# Allegro board kupl_t_0825.brd
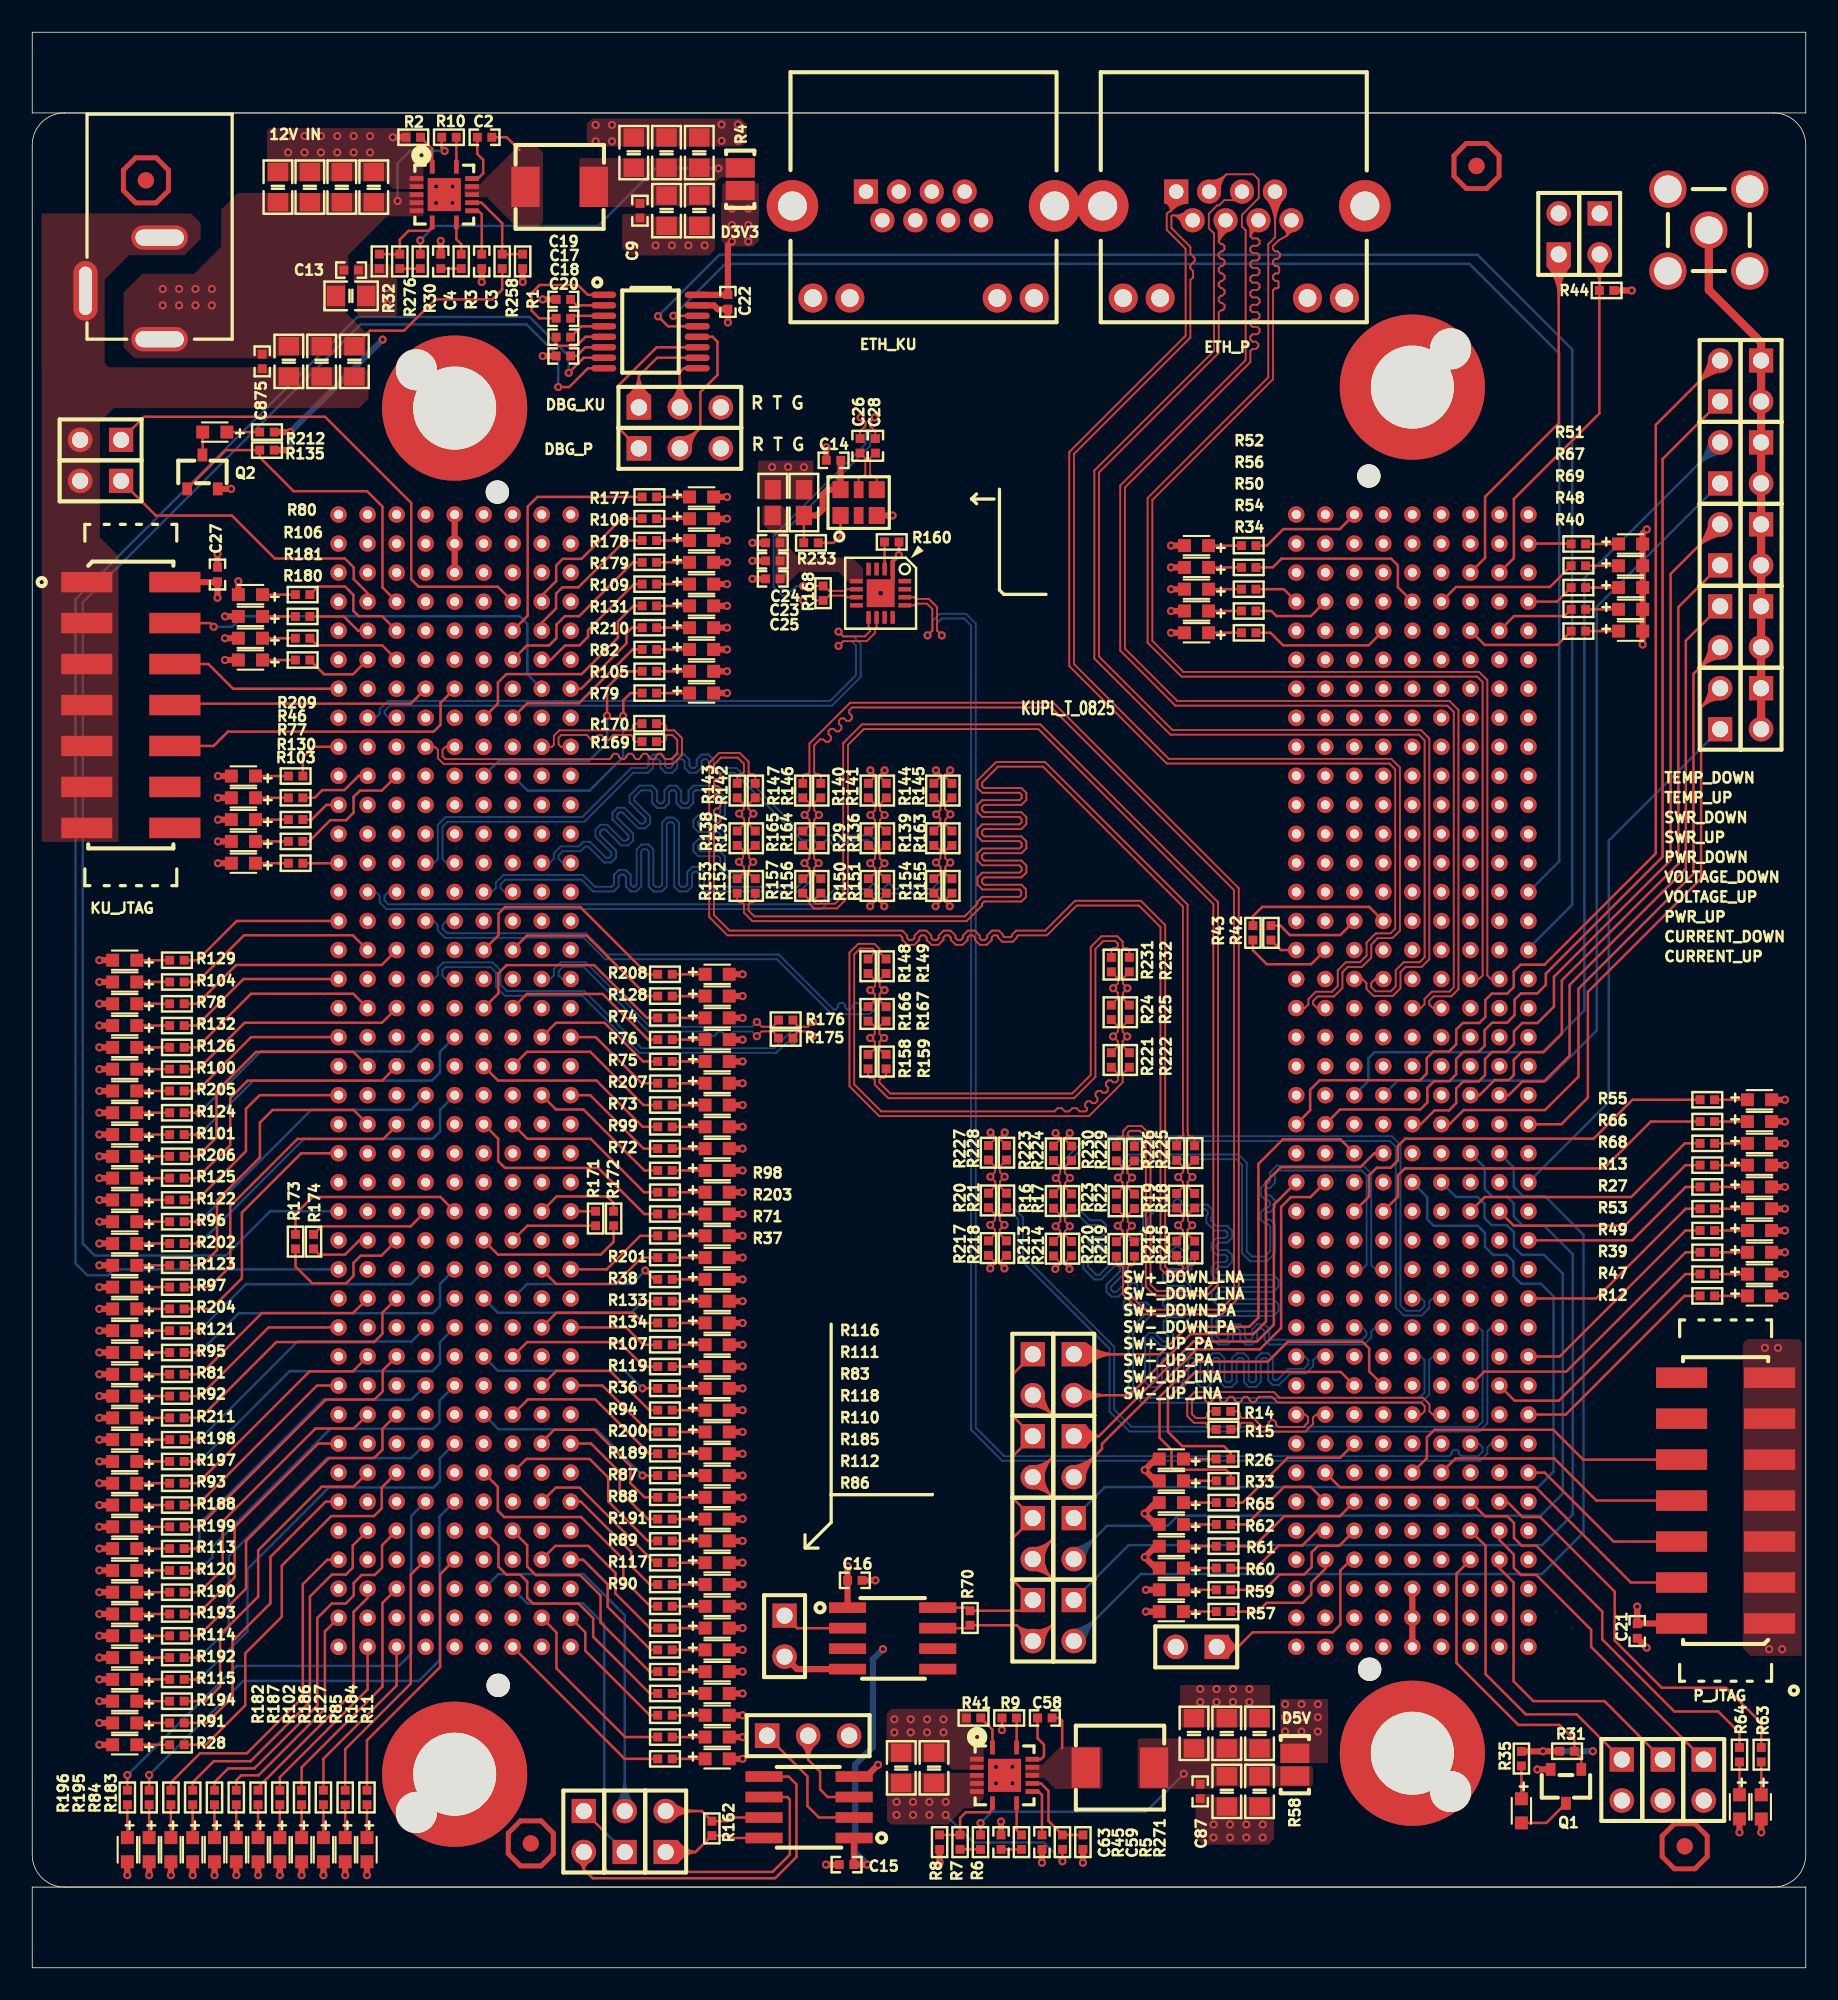
[diagram p0: board, top side]
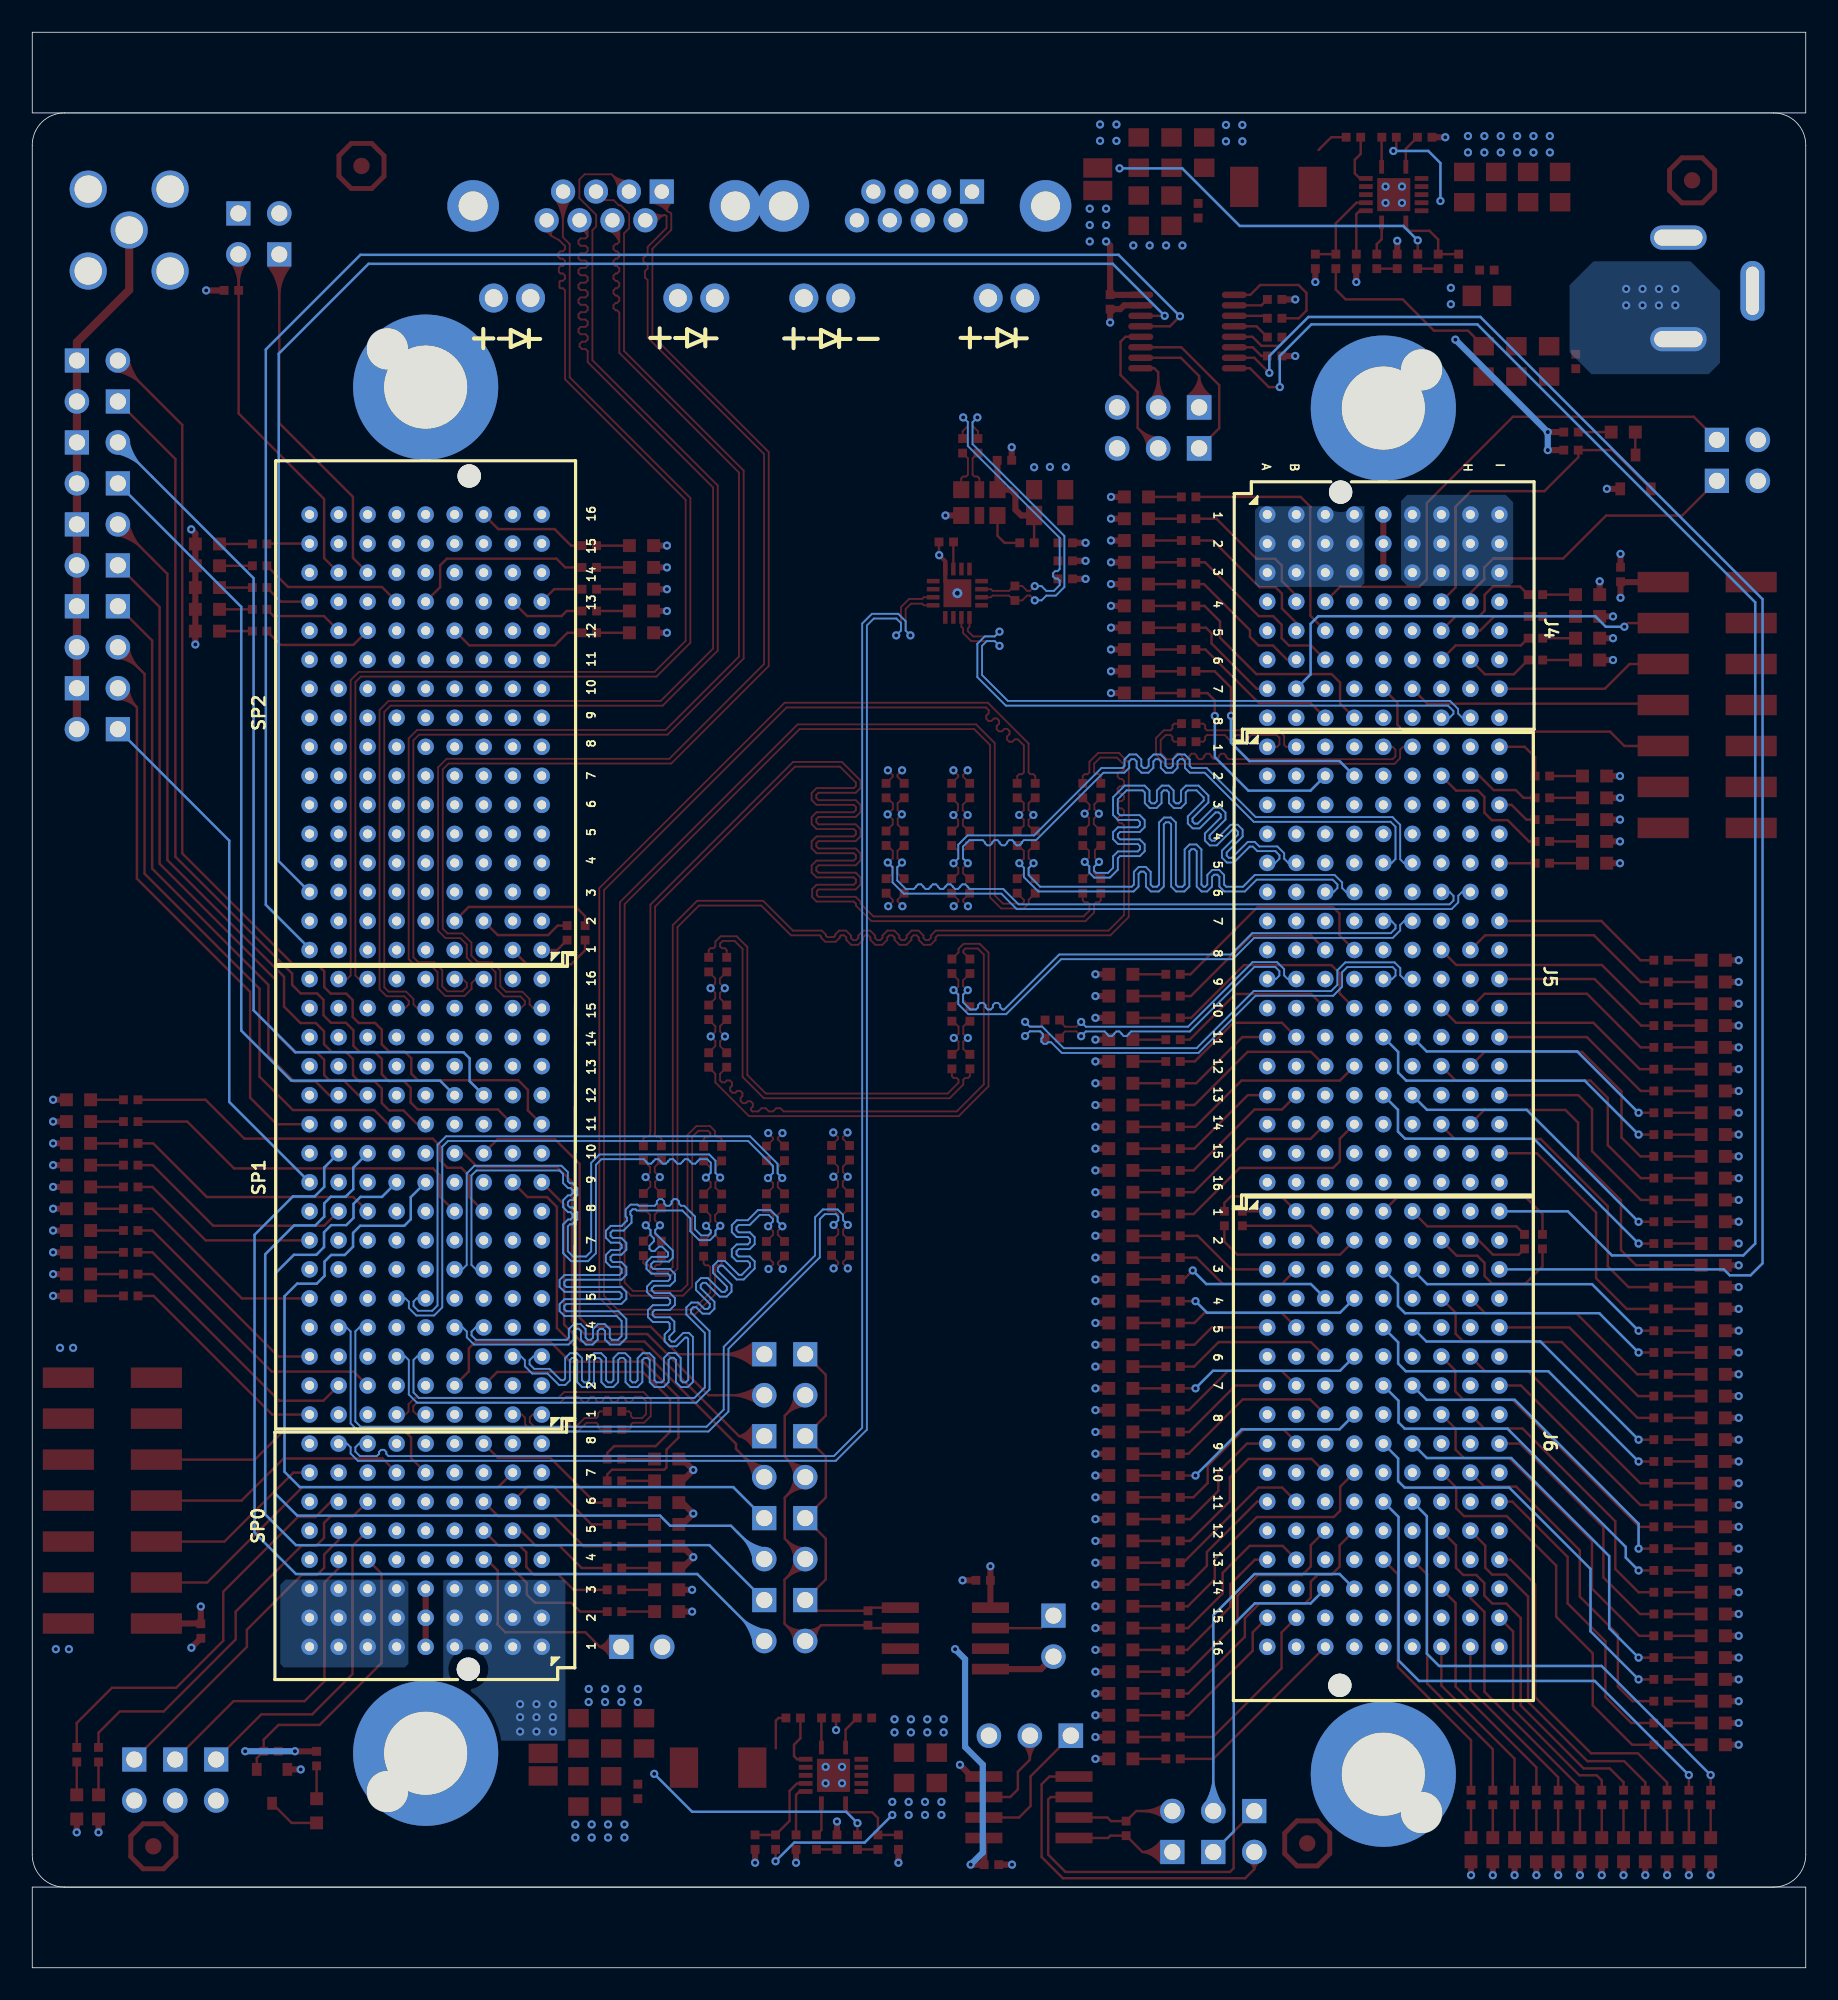
[diagram p1: board, bottom side, seen from below]

Outline 110 x 120 mm; copper layers: TOP, GND02, ART03, PWR04, PWR05, ART06, GND07, BOTTOM. Coordinates in mm from the lower left corner of the outline.
Outline path: 0,120 0,115 110,115 110,120 0,120 ; 0,113 arc(0.59,114.41) 2,115 108,115 arc(109.41,114.41) 110,113 110,7 arc(109.41,5.59) 108,5 2,5 arc(0.59,5.59) 0,7 0,113 ; 0,5 110,5 110,0 0,0 0,5

## Design rules (mm)
net group CLK100: nets UNNAMED_4_C_I128_B0 UNNAMED_4_C_I129_B0
net group CLK100M: nets UNNAMED_4_C_I129_A0 UNNAMED_4_R_I8_B0
net group DI_SRIO_KU: nets DI+_SRIO_KU DI-_SRIO_KU
net group DO_SRIO_KU: nets DO+_SRIO_KU DO-_SRIO_KU
net group ETH_TD1_KU: nets ETH_TD1+_KU ETH_TD1-_KU
net group ETH_TD1_P: nets ETH_TD1+_P ETH_TD1-_P
net group ETH_TD2_KU: nets ETH_TD2+_KU ETH_TD2-_KU
net group ETH_TD2_P: nets ETH_TD2+_P ETH_TD2-_P
net group ETH_TD3_KU: nets ETH_TD3+_KU ETH_TD3-_KU
net group ETH_TD3_P: nets ETH_TD3+_P ETH_TD3-_P
net group ETH_TD4_KU: nets ETH_TD4+_KU ETH_TD4-_KU
net group ETH_TD4_P: nets ETH_TD4+_P ETH_TD4-_P
net group KU2P_AUX: nets UNNAMED_4_R_I107_A0 UNNAMED_4_R_I108_A0
net group P2KU_AUX: nets UNNAMED_4_R_I117_B0 UNNAMED_4_R_I118_B0
net group REFCLK_KU: nets REFCLK+_KU REFCLK-_KU
net group REFCLK_P: nets REFCLK+_P REFCLK-_P
net group SRIO_AUX_KU2P: nets SRIO+_AUX_KU2P SRIO-_AUX_KU2P
net group SRIO_AUX_KU2P_K: nets SRIO+_AUX_KU2P_K SRIO-_AUX_KU2P_K
net group SRIO_AUX_P2KU: nets SRIO+_AUX_P2KU SRIO-_AUX_P2KU
net group SRIO_AUX_P2KU_K: nets SRIO+_AUX_P2KU_K SRIO-_AUX_P2KU_K
net group SRIO_KU2NET: nets SRIO+_KU2NET SRIO-_KU2NET
net group SRIO_NET2KU: nets SRIO+_NET2KU SRIO-_NET2KU
net group SRIO_NET2P: nets SRIO+_NET2P SRIO-_NET2P
net group SRIO_P2NET: nets SRIO+_P2NET SRIO-_P2NET
net group KU2P_MAIN: nets UNNAMED_4_R_I49_B0 UNNAMED_4_R_I100_A0 UNNAMED_4_R_I101_A0 UNNAMED_4_R_I102_A0 UNNAMED_4_R_I103_A0 UNNAMED_4_R_I104_A0 UNNAMED_4_R_I105_A0 UNNAMED_4_R_I106_A0
net group P2KU_MAIN: nets UNNAMED_4_R_I109_B0 UNNAMED_4_R_I110_B0 UNNAMED_4_R_I111_B0 UNNAMED_4_R_I112_B0 UNNAMED_4_R_I113_B0 UNNAMED_4_R_I114_B0 UNNAMED_4_R_I115_B0 UNNAMED_4_R_I116_B0
net group SRIO_MAIN_KU2P: nets SRIO0+_MAIN_KU2P SRIO0-_MAIN_KU2P SRIO1+_MAIN_KU2P SRIO1-_MAIN_KU2P SRIO2+_MAIN_KU2P SRIO2-_MAIN_KU2P SRIO3+_MAIN_KU2P SRIO3-_MAIN_KU2P
net group SRIO_MAIN_KU2P_K: nets SRIO0+_MAIN_KU2P_K SRIO0-_MAIN_KU2P_K SRIO1+_MAIN_KU2P_K SRIO1-_MAIN_KU2P_K SRIO2+_MAIN_KU2P_K SRIO2-_MAIN_KU2P_K SRIO3+_MAIN_KU2P_K SRIO3-_MAIN_KU2P_K
net group SRIO_MAIN_P2KU: nets SRIO0+_MAIN_P2KU SRIO0-_MAIN_P2KU SRIO1+_MAIN_P2KU SRIO1-_MAIN_P2KU SRIO2+_MAIN_P2KU SRIO2-_MAIN_P2KU SRIO3+_MAIN_P2KU SRIO3-_MAIN_P2KU
net group SRIO_MAIN_P2KU_K: nets SRIO0+_MAIN_P2KU_K SRIO0-_MAIN_P2KU_K SRIO1+_MAIN_P2KU_K SRIO1-_MAIN_P2KU_K SRIO2+_MAIN_P2KU_K SRIO2-_MAIN_P2KU_K SRIO3+_MAIN_P2KU_K SRIO3-_MAIN_P2KU_K

## Placement (name value [footprint] x y rotation side)
C1  -  [C0805_S]  19.2 110.4 270 top
C2  -  [C0402_S]  28.06 113.49 0 top
C3  -  [C0402_S]  27.88 105.79 90 top
C4  -  [C0402_S]  25.34 105.79 270 top
C5  -  [C0805_S]  41.37 112.54 270 top
C6  -  [C0805_S]  41.37 108.94 90 top
C7  -  [C0805_S]  39.34 112.54 270 top
C8  -  [C0805_S]  39.34 108.94 90 top
C9  -  [C0402_S]  37.69 108.94 90 top
C10  -  [C0805_S]  53.9 12.39 270 top
C11  -  [C0805_S]  21.18 110.4 270 top
C12  -  [C0805_S]  76.12 14.53 270 top
C13  -  [C0402_S]  19.78 105.26 180 top
C14  -  [C0402_S]  49.7 93.46 0 top
C15  -  [C0402_S]  50.51 6.39 0 top
C16  -  [C0402_S]  51.02 24.02 180 top
C17  -  [C0402_S]  32.94 102.27 180 top
C18  -  [C0402_S]  32.94 101.1 0 top
C19  -  [C0402_S]  32.94 103.43 0 top
C20  -  [C0402_S]  32.94 99.93 0 top
C21  -  [C0402_S]  99.55 20.88 270 top
C22  -  [C0402_S]  43.15 103.28 270 top
C23  -  [C0402_S]  45.93 87.23 0 top
C24  -  [C0402_S]  45.93 88.35 0 top
C25  -  [C0402_S]  45.93 86.11 0 top
C26  -  [C0402_S]  51.34 94.36 270 top
C27  -  [C0402_S]  11.49 86.38 90 top
C28  -  [C0402_S]  52.29 94.36 270 top
C47  -  [C0805_S]  55.93 12.39 270 top
C51  -  [C0805_S]  17.22 110.4 270 top
C53  -  [C0805_S]  19.78 103.66 180 top
C54  -  [C0805_S]  17.95 99.59 90 top
C58  -  [C0402_S]  62.8 15.49 0 top
C59  -  [C0402_S]  62.63 7.79 90 top
C63  -  [C0402_S]  60.09 7.79 270 top
C77  -  [C0805_S]  74.09 10.93 90 top
C79  -  [C0805_S]  37.31 112.54 270 top
C81  -  [C0805_S]  76.12 10.93 90 top
C83  -  [C0805_S]  74.09 14.53 270 top
C85  -  [C0805_S]  72.06 14.53 270 top
C87  -  [C0402_S]  72.44 10.93 90 top
C127  -  [C0805_S]  19.98 99.59 90 top
C128  -  [C0805_S]  15.92 99.59 90 top
C129  -  [C0805_S]  15.24 110.4 270 top
C875  -  [C0402_S]  14.26 99.59 90 top
CN1  -  [AC_CONN_3]  7.9 100.97 270 top
D1  -  [EVLT_19_217_S]  107.13 41.65 180 top
D2  -  [EVLT_19_217_S]  107.13 49.76 180 top
D3  -  [EVLT_19_217_S]  70.65 31.54 0 top
D4  -  [EVLT_19_217_S]  107.13 48.41 180 top
D5  -  [EVLT_19_217_S]  70.65 30.19 0 top
D6  -  [EVLT_19_217_S]  72.21 82.77 0 top
D7  -  [EVLT_19_217_S]  92.36 9.73 90 top
D8  -  [EVLT_19_217_S]  5.74 17.88 0 top
D9  -  [EVLT_19_217_S]  107.13 44.36 180 top
D10  -  [EVLT_19_217_S]  99.14 82.87 180 top
D11  -  [EVLT_19_217_S]  107.13 43.01 180 top
D12  -  [EVLT_19_217_S]  99.14 84.22 180 top
D13  -  [EVLT_19_217_S]  107.13 45.71 180 top
D14  -  [EVLT_19_217_S]  72.21 85.47 0 top
D15  -  [EVLT_19_217_S]  107.13 47.06 180 top
D16  -  [EVLT_19_217_S]  72.21 84.12 0 top
D17  -  [EVLT_19_217_S]  99.14 88.27 180 top
D18  -  [EVLT_19_217_S]  72.21 88.17 0 top
D19  -  [EVLT_19_217_S]  107.13 53.81 180 top
D20  -  [EVLT_19_217_S]  72.21 86.82 0 top
D21  -  [EVLT_19_217_S]  107.13 52.46 180 top
D22  -  [EVLT_19_217_S]  99.14 86.92 180 top
D23  -  [EVLT_19_217_S]  70.65 22.08 0 top
D24  -  [EVLT_19_217_S]  70.65 23.43 0 top
D25  -  [EVLT_19_217_S]  70.65 24.78 0 top
D26  -  [EVLT_19_217_S]  70.65 26.13 0 top
D27  -  [EVLT_19_217_S]  70.65 27.49 0 top
D28  -  [EVLT_19_217_S]  107.24 9.97 90 top
D29  -  [EVLT_19_217_S]  105.89 9.97 90 top
D30  -  [EVLT_19_217_S]  70.65 28.84 0 top
D31  -  [EVLT_19_217_S]  107.13 51.11 180 top
D32  -  [EVLT_19_217_S]  99.14 85.57 180 top
D33  VAL  [SPX_TSSOP16_S]  38.35 101.44 0 top
D34  -  [EVLT_19_217_S]  11.3 7.32 90 top
D35  -  [EVLT_19_217_S]  20.76 7.32 90 top
D36  -  [EVLT_19_217_S]  42.48 15.65 180 top
D37  -  [EVLT_19_217_S]  5.74 28.69 0 top
D38  -  [EVLT_19_217_S]  5.74 23.28 0 top
D39  -  [EVLT_19_217_S]  5.74 19.23 0 top
D40  -  [EVLT_19_217_S]  5.74 13.82 0 top
D41  -  [EVLT_19_217_S]  7.25 7.32 90 top
D42  -  [EVLT_19_217_S]  5.74 31.39 0 top
D43  -  [EVLT_19_217_S]  42.48 35.92 180 top
D44  -  [EVLT_19_217_S]  42.48 45.38 180 top
D45  -  [EVLT_19_217_S]  42.48 42.68 180 top
D46  -  [EVLT_19_217_S]  42.48 48.08 180 top
D47  -  [EVLT_19_217_S]  5.74 40.85 0 top
D48  -  [EVLT_19_217_S]  5.74 54.36 0 top
D49  -  [EVLT_19_217_S]  5.74 50.31 0 top
D50  -  [EVLT_19_217_S]  42.48 54.84 180 top
D51  -  [EVLT_19_217_S]  13.1 72.53 0 top
D52  -  [EVLT_19_217_S]  42.48 61.59 180 top
D53  -  [EVLT_19_217_S]  13.1 73.89 0 top
D54  -  [EVLT_19_217_S]  41.51 83.08 180 top
D55  -  [EVLT_19_217_S]  5.74 34.09 0 top
D56  -  [EVLT_19_217_S]  13.53 82.43 0 top
D57  -  [EVLT_19_217_S]  9.95 7.32 90 top
D58  -  [EVLT_19_217_S]  19.41 7.32 90 top
D59  -  [EVLT_19_217_S]  15.36 7.32 90 top
D60  -  [EVLT_19_217_S]  12.65 7.32 90 top
D61  -  [EVLT_19_217_S]  42.48 31.87 180 top
D62  -  [EVLT_19_217_S]  42.48 27.81 180 top
D63  -  [EVLT_19_217_S]  5.74 21.93 0 top
D64  -  [EVLT_19_217_S]  5.74 16.53 0 top
D65  -  [EVLT_19_217_S]  5.9 7.32 90 top
D66  -  [EVLT_19_217_S]  5.74 32.74 0 top
D67  -  [EVLT_19_217_S]  5.74 27.34 0 top
D68  -  [EVLT_19_217_S]  42.48 33.22 180 top
D69  -  [EVLT_19_217_S]  42.48 44.03 180 top
D70  -  [EVLT_19_217_S]  5.74 44.9 0 top
D71  -  [EVLT_19_217_S]  42.48 46.73 180 top
D72  -  [EVLT_19_217_S]  42.48 50.78 180 top
D73  -  [EVLT_19_217_S]  42.48 53.49 180 top
D74  -  [EVLT_19_217_S]  42.48 58.89 180 top
D75  -  [EVLT_19_217_S]  42.48 56.19 180 top
D76  -  [EVLT_19_217_S]  42.48 57.54 180 top
D77  -  [EVLT_19_217_S]  13.1 71.18 0 top
D78  -  [EVLT_19_217_S]  5.74 59.77 0 top
D79  -  [EVLT_19_217_S]  41.51 79.03 180 top
D80  -  [EVLT_19_217_S]  13.53 85.13 0 top
D81  -  [EVLT_19_217_S]  5.74 36.79 0 top
D82  -  [EVLT_19_217_S]  41.51 81.73 180 top
D83  -  [EVLT_19_217_S]  42.48 19.71 180 top
D84  -  [EVLT_19_217_S]  8.6 7.32 90 top
D85  -  [EVLT_19_217_S]  18.06 7.32 90 top
D86  -  [EVLT_19_217_S]  42.48 12.95 180 top
D87  -  [EVLT_19_217_S]  42.48 30.52 180 top
D88  -  [EVLT_19_217_S]  42.48 29.17 180 top
D89  -  [EVLT_19_217_S]  42.48 26.46 180 top
D90  -  [EVLT_19_217_S]  42.48 23.76 180 top
D91  -  [EVLT_19_217_S]  5.74 15.18 0 top
D92  -  [EVLT_19_217_S]  5.74 35.44 0 top
D93  -  [EVLT_19_217_S]  5.74 30.04 0 top
D94  -  [EVLT_19_217_S]  42.48 34.57 180 top
D95  -  [EVLT_19_217_S]  5.74 38.15 0 top
D96  -  [EVLT_19_217_S]  5.74 46.25 0 top
D97  -  [EVLT_19_217_S]  5.74 42.2 0 top
D98  -  [EVLT_19_217_S]  42.48 49.43 180 top
D99  -  [EVLT_19_217_S]  42.48 52.14 180 top
D100  -  [EVLT_19_217_S]  5.74 55.71 0 top
D101  -  [EVLT_19_217_S]  5.74 51.66 0 top
D102  -  [EVLT_19_217_S]  14.01 7.32 90 top
D103  -  [EVLT_19_217_S]  13.1 68.48 0 top
D104  -  [EVLT_19_217_S]  5.74 61.12 0 top
D105  -  [EVLT_19_217_S]  41.51 80.38 180 top
D106  -  [EVLT_19_217_S]  13.53 83.78 0 top
D107  -  [EVLT_19_217_S]  42.48 38.62 180 top
D109  -  [EVLT_19_217_S]  41.51 89.84 180 top
D110  -  [EVLT_19_217_S]  41.51 91.19 180 top
D111  -  [EVLT_19_217_S]  41.51 88.49 180 top
D112  -  [EVLT_19_217_S]  41.51 87.14 180 top
D113  -  [EVLT_19_217_S]  41.51 85.79 180 top
D114  -  [EVLT_19_217_S]  13.53 81.08 0 top
D115  -  [EVLT_19_217_S]  42.48 17 180 top
D116  -  [EVLT_19_217_S]  42.48 21.06 180 top
D117  -  [EVLT_19_217_S]  42.48 14.3 180 top
D118  -  [EVLT_19_217_S]  5.74 25.99 0 top
D119  -  [EVLT_19_217_S]  5.74 20.58 0 top
D120  -  [EVLT_19_217_S]  42.48 22.41 180 top
D121  -  [EVLT_19_217_S]  42.48 25.11 180 top
D122  -  [EVLT_19_217_S]  42.48 18.36 180 top
D123  -  [EVLT_19_217_S]  42.48 37.27 180 top
D124  -  [EVLT_19_217_S]  5.74 24.63 0 top
D125  -  [EVLT_19_217_S]  5.74 39.5 0 top
D126  -  [EVLT_19_217_S]  5.74 47.6 0 top
D127  -  [EVLT_19_217_S]  5.74 43.55 0 top
D128  -  [EVLT_19_217_S]  5.74 53.01 0 top
D129  -  [EVLT_19_217_S]  5.74 48.96 0 top
D130  -  [EVLT_19_217_S]  5.74 57.06 0 top
D131  -  [EVLT_19_217_S]  16.71 7.32 90 top
D132  -  [EVLT_19_217_S]  42.48 60.24 180 top
D133  -  [EVLT_19_217_S]  5.74 62.47 0 top
D134  -  [EVLT_19_217_S]  13.1 69.83 0 top
D135  -  [EVLT_19_217_S]  41.51 84.43 180 top
D136  -  [EVLT_19_217_S]  5.74 58.41 0 top
D137  -  [EVLT_19_217_S]  42.48 41.33 180 top
D138  -  [EVLT_19_217_S]  42.48 39.98 180 top
D139  -  [EVLT_19_217_S]  11.32 95.21 0 top
GJ1  -  [SIT_3225_S]  51.26 90.84 0 top
J1  -  [STD_2P54_1X2_DIP]  5.51 94.73 180 top
J2  -  [STD_2P54_1X3_DIP]  37.63 96.74 0 top
J3  -  [STD_2P54_1X2_DIP]  101.13 12.91 270 top
J4  -  [1410186_1_T]  26.2 83.8 270 bottom
J5  -  [1410140_1_T]  26.2 62.2 270 bottom
J6  -  [1410142_1_T]  26.2 33.4 270 bottom
J7  -  [STD_2P54_1X3_DIP]  45.58 14.39 0 top
J8  -  [STD_2P54_1X2_DIP]  36.75 7.18 90 top
J9  -  [STD_2P54_1X2_DIP]  39.29 7.18 90 top
J10  -  [STD_2P54_1X2_DIP]  97.22 108.77 270 top
J11  -  [STD_2P54_1X2_DIP]  34.21 9.72 270 top
J12  -  [STD_2P54_1X2_DIP]  5.51 92.19 180 top
J13  -  [STD_2P54_1X2_DIP]  94.68 106.23 90 top
J16  -  [STD_2P54_1X2_DIP]  107.23 89.49 270 top
J17  -  [STD_2P54_1X2_DIP]  107.23 94.57 270 top
J18  -  [STD_2P54_1X2_DIP]  107.23 99.65 270 top
J19  -  [STD_2P54_1X2_DIP]  107.23 79.33 270 top
J20  -  [STD_2P54_1X2_DIP]  107.23 84.41 270 top
J21  -  [STD_2P54_1X2_DIP]  73.46 19.89 180 top
J22  -  [STD_2P54_1X2_DIP]  104.69 86.95 90 top
J23  -  [STD_2P54_1X2_DIP]  104.69 97.11 90 top
J24  -  [STD_2P54_1X2_DIP]  104.69 76.79 90 top
J25  -  [STD_2P54_1X2_DIP]  104.69 84.41 270 top
J26  -  [STD_2P54_1X2_DIP]  104.69 92.03 90 top
J29  -  [STD_2P54_1X2_DIP]  98.59 12.91 270 top
J32  -  [STD_2P54_1X2_DIP]  46.66 21.83 270 top
J35  -  [STD_2P54_1X2_DIP]  103.67 12.91 270 top
J36  -  [STD_2P54_1X3_DIP]  37.63 94.2 0 top
J39  -  [STD_2P54_1X2_DIP]  62.06 38.04 270 top
J40  -  [STD_2P54_1X2_DIP]  62.06 32.96 270 top
J41  -  [STD_2P54_1X2_DIP]  62.06 27.88 270 top
J42  -  [STD_2P54_1X2_DIP]  62.06 22.8 270 top
J43  -  [STD_2P54_1X2_DIP]  64.6 27.88 270 top
J44  -  [STD_2P54_1X2_DIP]  64.6 32.96 270 top
J45  -  [STD_2P54_1X2_DIP]  64.6 22.8 270 top
J46  -  [STD_2P54_1X2_DIP]  64.6 38.04 270 top
L1  -  [CETC_0530_S]  32.71 110.41 0 top
L2  -  [MUR_BLM18_S]  47.86 90.84 270 top
L3  -  [MUR_BLM18_S]  45.93 90.84 270 top
L9  -  [CETC_0530_S]  67.46 12.41 0 top
NOREF  -  [unnamed]  102.49 7.53 0 top
NOREF#2  -  [unnamed]  7.05 110.82 0 top
NOREF#3  -  [unnamed]  89.58 111.71 0 top
NOREF#4  -  [unnamed]  30.92 7.71 0 top
Q1  -  [NXP_SOT23_S]  95.13 11.25 180 top
Q2  -  [NXP_SOT23_S]  10.56 92.74 0 top
R1  -  [R0402_S]  30.42 105.79 90 top
R2  -  [R0402_S]  23.64 113.49 0 top
R3  -  [R0402_S]  26.61 105.79 90 top
R4  -  [R_TEST]  43.91 110.89 270 top
R5  -  [R0402_S]  63.9 7.79 270 top
R6  -  [R0402_S]  58.82 7.79 270 top
R7  -  [R0402_S]  57.55 7.79 270 top
R8  -  [R0402_S]  56.28 7.79 90 top
R9  -  [R0402_S]  60.59 15.49 180 top
R10  -  [R0402_S]  25.85 113.49 180 top
R11  -  [R0402_S]  20.76 10.56 270 top
R12  -  [R0402_S]  103.89 41.65 0 top
R13  -  [R0402_S]  103.89 49.76 0 top
R14  -  [R0402_S]  73.88 34.49 0 top
R15  -  [R0402_S]  73.88 33.38 0 top
R16  -  [R0402_S]  63.34 47.54 90 top
R17  -  [R0402_S]  64.46 47.54 90 top
R18  -  [R0402_S]  72.1 47.55 90 top
R19  -  [R0402_S]  70.98 47.55 90 top
R20  -  [R0402_S]  59.31 47.57 90 top
R21  -  [R0402_S]  60.43 47.57 90 top
R22  -  [R0402_S]  68.36 47.52 90 top
R23  -  [R0402_S]  67.24 47.52 90 top
R24  -  [R0402_S]  66.93 59.24 90 top
R25  -  [R0402_S]  68.04 59.24 90 top
R26  -  [R0402_S]  73.89 31.54 180 top
R27  -  [R0402_S]  103.89 48.41 0 top
R28  -  [R0402_S]  8.97 13.82 180 top
R29  -  [R0402_S]  51.86 70.03 270 top
R30  -  [R0402_S]  24.07 105.79 270 top
R31  -  [R0402_S]  95.19 13.42 180 top
R32  -  [R0402_S]  21.53 105.79 90 top
R33  -  [R0402_S]  73.89 30.19 180 top
R34  -  [R0402_S]  75.45 82.77 180 top
R35  -  [R0402_S]  92.36 12.97 270 top
R36  -  [R0402_S]  39.24 35.92 0 top
R37  -  [R0402_S]  39.24 45.38 0 top
R38  -  [R0402_S]  39.24 42.68 0 top
R39  -  [R0402_S]  103.89 44.36 0 top
R40  -  [R0402_S]  95.9 82.87 0 top
R41  -  [R0402_S]  58.38 15.49 0 top
R42  -  [R0402_S]  76.83 64.16 90 top
R43  -  [R0402_S]  75.71 64.16 90 top
R44  -  [R0402_S]  97.65 103.99 0 top
R45  -  [R0402_S]  61.36 7.79 90 top
R46  -  [R0402_S]  16.34 72.53 180 top
R47  -  [R0402_S]  103.89 43.01 0 top
R48  -  [R0402_S]  95.9 84.22 0 top
R49  -  [R0402_S]  103.89 45.71 0 top
R50  -  [R0402_S]  75.45 85.47 180 top
R51  -  [R0402_S]  95.9 88.27 0 top
R52  -  [R0402_S]  75.45 88.17 180 top
R53  -  [R0402_S]  103.89 47.06 0 top
R54  -  [R0402_S]  75.45 84.12 180 top
R55  -  [R0402_S]  103.89 53.81 0 top
R56  -  [R0402_S]  75.45 86.82 180 top
R57  -  [R0402_S]  73.89 22.08 180 top
R58  -  [R_TEST]  78.31 12.59 90 top
R59  -  [R0402_S]  73.89 23.43 180 top
R60  -  [R0402_S]  73.89 24.78 180 top
R61  -  [R0402_S]  73.89 26.13 180 top
R62  -  [R0402_S]  73.89 27.49 180 top
R63  -  [R0402_S]  107.24 13.21 270 top
R64  -  [R0402_S]  105.89 13.21 270 top
R65  -  [R0402_S]  73.89 28.84 180 top
R66  -  [R0402_S]  103.89 52.46 0 top
R67  -  [R0402_S]  95.9 86.92 0 top
R68  -  [R0402_S]  103.89 51.11 0 top
R69  -  [R0402_S]  95.9 85.57 0 top
R70  -  [R0402_S]  58.16 21.68 270 top
R71  -  [R0402_S]  39.24 46.73 0 top
R72  -  [R0402_S]  39.24 50.78 0 top
R73  -  [R0402_S]  39.24 53.49 0 top
R74  -  [R0402_S]  39.24 58.89 0 top
R75  -  [R0402_S]  39.24 56.19 0 top
R76  -  [R0402_S]  39.24 57.54 0 top
R77  -  [R0402_S]  16.34 71.18 180 top
R78  -  [R0402_S]  8.97 59.77 180 top
R79  -  [R0402_S]  38.28 79.03 0 top
R80  -  [R0402_S]  16.77 85.13 180 top
R81  -  [R0402_S]  8.97 36.79 180 top
R82  -  [R0402_S]  38.28 81.73 0 top
R83  -  [R0402_S]  39.24 19.71 0 top
R84  -  [R0402_S]  8.6 10.56 270 top
R85  -  [R0402_S]  18.06 10.56 270 top
R86  -  [R0402_S]  39.24 12.95 0 top
R87  -  [R0402_S]  39.24 30.52 0 top
R88  -  [R0402_S]  39.24 29.17 0 top
R89  -  [R0402_S]  39.24 26.46 0 top
R90  -  [R0402_S]  39.24 23.76 0 top
R91  -  [R0402_S]  8.97 15.18 180 top
R92  -  [R0402_S]  8.97 35.44 180 top
R93  -  [R0402_S]  8.97 30.04 180 top
R94  -  [R0402_S]  39.24 34.57 0 top
R95  -  [R0402_S]  8.97 38.15 180 top
R96  -  [R0402_S]  8.97 46.25 180 top
R97  -  [R0402_S]  8.97 42.2 180 top
R98  -  [R0402_S]  39.24 49.43 0 top
R99  -  [R0402_S]  39.24 52.14 0 top
R100  -  [R0402_S]  8.97 55.71 180 top
R101  -  [R0402_S]  8.97 51.66 180 top
R102  -  [R0402_S]  14.01 10.56 270 top
R103  -  [R0402_S]  16.34 68.48 180 top
R104  -  [R0402_S]  8.97 61.12 180 top
R105  -  [R0402_S]  38.28 80.38 0 top
R106  -  [R0402_S]  16.77 83.78 180 top
R107  -  [R0402_S]  39.24 38.62 0 top
R108  -  [R0402_S]  38.28 89.84 0 top
R109  -  [R0402_S]  38.28 85.79 0 top
R110  -  [R0402_S]  39.24 17 0 top
R111  -  [R0402_S]  39.24 21.06 0 top
R112  -  [R0402_S]  39.24 14.3 0 top
R113  -  [R0402_S]  8.97 25.98 180 top
R114  -  [R0402_S]  8.97 20.58 180 top
R115  -  [R0402_S]  8.97 17.88 180 top
R116  -  [R0402_S]  39.24 22.41 0 top
R117  -  [R0402_S]  39.24 25.11 0 top
R118  -  [R0402_S]  39.24 18.36 0 top
R119  -  [R0402_S]  39.24 37.27 0 top
R120  -  [R0402_S]  8.97 24.63 180 top
R121  -  [R0402_S]  8.97 39.5 180 top
R122  -  [R0402_S]  8.97 47.6 180 top
R123  -  [R0402_S]  8.97 43.55 180 top
R124  -  [R0402_S]  8.97 53.01 180 top
R125  -  [R0402_S]  8.97 48.96 180 top
R126  -  [R0402_S]  8.97 57.06 180 top
R127  -  [R0402_S]  16.71 10.56 270 top
R128  -  [R0402_S]  39.24 60.24 0 top
R129  -  [R0402_S]  8.97 62.47 180 top
R130  -  [R0402_S]  16.34 69.83 180 top
R131  -  [R0402_S]  38.28 84.43 0 top
R132  -  [R0402_S]  8.97 58.41 180 top
R133  -  [R0402_S]  39.24 41.33 0 top
R134  -  [R0402_S]  39.24 39.98 0 top
R135  -  [R0402_S]  14.56 94.09 0 top
R136  -  [R0402_S]  52.97 70.03 270 top
R137  -  [R0402_S]  44.84 70.03 270 top
R138  -  [R0402_S]  43.73 70.03 270 top
R139  -  [R0402_S]  55.92 70.03 270 top
R140  -  [R0402_S]  51.86 72.98 270 top
R141  -  [R0402_S]  52.97 72.98 270 top
R142  -  [R0402_S]  44.84 72.98 270 top
R143  -  [R0402_S]  43.73 72.98 270 top
R144  -  [R0402_S]  55.92 72.98 270 top
R145  -  [R0402_S]  57.04 72.98 270 top
R146  -  [R0402_S]  48.91 72.98 270 top
R147  -  [R0402_S]  47.79 72.98 270 top
R148  -  [R0402_S]  51.84 62.09 270 top
R149  -  [R0402_S]  52.96 62.09 270 top
R150  -  [R0402_S]  51.86 67.07 270 top
R151  -  [R0402_S]  52.97 67.07 270 top
R152  -  [R0402_S]  44.84 67.07 270 top
R153  -  [R0402_S]  43.73 67.07 270 top
R154  -  [R0402_S]  55.92 67.07 270 top
R155  -  [R0402_S]  57.04 67.07 270 top
R156  -  [R0402_S]  48.91 67.07 270 top
R157  -  [R0402_S]  47.79 67.07 270 top
R158  -  [R0402_S]  51.84 56.18 270 top
R159  -  [R0402_S]  52.96 56.18 270 top
R160  -  [R0402_S]  53.31 88.4 180 top
R162  -  [R0402_S]  42.15 8.64 90 top
R163  -  [R0402_S]  57.04 70.03 270 top
R164  -  [R0402_S]  48.91 70.03 270 top
R165  -  [R0402_S]  47.79 70.03 270 top
R166  -  [R0402_S]  51.84 59.14 270 top
R167  -  [R0402_S]  52.96 59.14 270 top
R168  -  [R0402_S]  49.05 85.22 270 top
R169  -  [R0402_S]  38.27 76.02 0 top
R170  -  [R0402_S]  38.27 77.13 0 top
R171  -  [R0402_S]  34.94 46.45 270 top
R172  -  [R0402_S]  36.06 46.45 270 top
R173  -  [R0402_S]  16.33 45.02 270 top
R174  -  [R0402_S]  17.45 45.02 270 top
R175  -  [R0402_S]  46.73 57.64 0 top
R176  -  [R0402_S]  46.73 58.76 0 top
R177  -  [R0402_S]  38.28 91.19 0 top
R178  -  [R0402_S]  38.28 88.49 0 top
R179  -  [R0402_S]  38.28 87.14 0 top
R180  -  [R0402_S]  16.77 81.08 180 top
R181  -  [R0402_S]  16.77 82.43 180 top
R182  -  [R0402_S]  11.3 10.56 270 top
R183  -  [R0402_S]  9.95 10.56 270 top
R184  -  [R0402_S]  19.41 10.56 270 top
R185  -  [R0402_S]  39.24 15.65 0 top
R186  -  [R0402_S]  15.36 10.56 270 top
R187  -  [R0402_S]  12.65 10.56 270 top
R188  -  [R0402_S]  8.97 28.69 180 top
R189  -  [R0402_S]  39.24 31.87 0 top
R190  -  [R0402_S]  8.97 23.28 180 top
R191  -  [R0402_S]  39.24 27.81 0 top
R192  -  [R0402_S]  8.97 19.23 180 top
R193  -  [R0402_S]  8.97 21.93 180 top
R194  -  [R0402_S]  8.97 16.53 180 top
R195  -  [R0402_S]  7.25 10.56 270 top
R196  -  [R0402_S]  5.9 10.56 270 top
R197  -  [R0402_S]  8.97 31.39 180 top
R198  -  [R0402_S]  8.97 32.74 180 top
R199  -  [R0402_S]  8.97 27.34 180 top
R200  -  [R0402_S]  39.24 33.22 0 top
R201  -  [R0402_S]  39.24 44.03 0 top
R202  -  [R0402_S]  8.97 44.9 180 top
R203  -  [R0402_S]  39.24 48.08 0 top
R204  -  [R0402_S]  8.97 40.85 180 top
R205  -  [R0402_S]  8.97 54.36 180 top
R206  -  [R0402_S]  8.97 50.31 180 top
R207  -  [R0402_S]  39.24 54.84 0 top
R208  -  [R0402_S]  39.24 61.59 0 top
R209  -  [R0402_S]  16.34 73.89 180 top
R210  -  [R0402_S]  38.28 83.08 0 top
R211  -  [R0402_S]  8.97 34.09 180 top
R212  -  [R0402_S]  14.56 95.21 180 top
R213  -  [R0402_S]  63.34 44.58 270 top
R214  -  [R0402_S]  64.46 44.58 270 top
R215  -  [R0402_S]  72.1 44.6 270 top
R216  -  [R0402_S]  70.98 44.6 270 top
R217  -  [R0402_S]  59.31 44.62 270 top
R218  -  [R0402_S]  60.43 44.62 270 top
R219  -  [R0402_S]  68.36 44.56 270 top
R220  -  [R0402_S]  67.24 44.56 270 top
R221  -  [R0402_S]  66.93 56.28 270 top
R222  -  [R0402_S]  68.04 56.28 270 top
R223  -  [R0402_S]  63.34 50.49 270 top
R224  -  [R0402_S]  64.46 50.49 270 top
R225  -  [R0402_S]  72.1 50.51 270 top
R226  -  [R0402_S]  70.98 50.51 270 top
R227  -  [R0402_S]  59.31 50.53 270 top
R228  -  [R0402_S]  60.43 50.53 270 top
R229  -  [R0402_S]  68.36 50.48 270 top
R230  -  [R0402_S]  67.24 50.48 270 top
R231  -  [R0402_S]  66.93 62.19 270 top
R232  -  [R0402_S]  68.04 62.19 270 top
R233  -  [R0402_S]  48.3 88.35 0 top
R258  -  [R0402_S]  29.15 105.79 270 top
R271  -  [R0402_S]  65.17 7.79 90 top
R276  -  [R0402_S]  22.8 105.79 270 top
SP0  -  [1410186_1_T]  85.6 26.2 90 bottom
SP1  -  [1410140_1_T]  85.6 47.8 90 bottom
SP2  -  [1410142_1_T]  85.6 76.6 90 bottom
U1  -  [TI_PVQFN_N14_S]  25.56 109.93 270 top
U2  -  [SPX_NSOIC8_S]  53.36 20.42 0 top
U3  -  [SPX_NSOIC8_S]  48.18 9.95 180 top
U4  -  [SIL_QFN16_3X3MM_S]  52.62 85.22 270 top
U9  -  [TI_PVQFN_N14_S]  60.31 11.93 270 top
X1  -  [1_1469491_X_T]  26.2 96.7 135 bottom
X2  -  [1_1469491_X_T]  26.2 12 225 bottom
X19  -  [1_1469491_X_T]  85.6 98 45 bottom
X20  -  [1_1469491_X_T]  85.6 13.3 315 bottom
XP1  -  [STC_TSM_107_01_DV_S]  105.03 28.96 90 top
XP2  -  [STC_TSM_107_01_DV_S]  6.11 78.29 270 top
XS1  -  [TYCO_406549_1_T]  78.09 108.34 180 top
XS3  -  [STD_SMA_5P_01_DIP]  103.99 107.74 0 top
XS4  -  [TYCO_406549_1_T]  58.85 108.34 180 top

## Library data of the parts
C1 C5-C8 C10-C12 C47 C51 C53 C54 C77 C79 C81 C83 C85 C127-C129 = C: part number: C-22UF,51090325,+/-20%,25V,X5R,C0805_S
C2 C9 C13-C22 C25-C28 C58 C87 = C: part number: C-0.1UF,51122013,+/-10%,16V,X7R,C0402_S
C3 C4 C59 C63 C875 = C: part number: C-0.01UF,51132016,+/-10%,50V,X7R,C0402_S
C23 = C: part number: C-10UF,51090303,+/-10%,6.3V,X5R,C0402_S
C24 = C: part number: C-1UF,51112003,+/-10%,10V,X5R,C0402_S
CN1 = AC_CONNECT: part number: AC_CONNECT-33100011,AC_CONN_3,DC-005,****,AC_CONNECT
D1-D32 D34-D107 D109-D139 = LED: part number: LED-********,EVLT_19_217_S,RED/0603,**,RED/0603; room: *
D33 = SPX_SP3232EEY: part number: SPX_SP3232EEY-**,SPX_TSSOP16_S,SP3232EEY,SIPEX,SP3232EEY
GJ1 = SIT9120AI: part number: SIT9120AI-********,SIT_3225_S,SIT9120AI-2B1-33E100.000000,SIT9120AI-2B1-33E100.000000,SITIME
J1 J3 J8-J13 J16-J26 J29 J32 J35 J39-J46 = STD_2P54_1X2_DIP: part number: STD_2P54_1X2_DIP-********,STD_2P54_1X2_DIP,1X2-2.54MM,**,1X2-2.54MM
J2 J7 J36 = STD_2P54_1X3_DIP: part number: STD_2P54_1X3_DIP-********,STD_2P54_1X3_DIP,1X3-2.54MM,**,1X3-2.54MM
J4 SP0 = TYCO_1410186_1: part number: TYCO_1410186_1-**,1410186-1,1410186_1_T,TYCO,1410186-1
J5 SP1 = TYCO_1410140_1: part number: TYCO_1410140_1-**,1410140-1,1410140_1_T,TYCO,1410140-1
J6 SP2 = TYCO_1410142_1: part number: TYCO_1410142_1-**,1410142-1,1410142_1_T,TYCO,1410142-1
L1 L9 = L_PWR: part number: L_PWR-3.3UH,********,CETC-0530-3R3-M-B,+/-20%,POWER,CETC_0530_S
L2 L3 = BLM18: part number: BLM18-40250000,BLM18PG330SN1B,MUR_BLM18_S,MURATA,33OHM
Q1 Q2 = WILL_MOS_N: part number: WILL_MOS_N-********,NXP_SOT23_S,BSS138,JCET,BSS138
R1 R8 R233 R271 R276 = R: part number: R-10K,1/16W,52111059,+/-1%,R0402_S
R2 R41 = R: part number: R-91K,1/16W,52111054,+/-1%,R0402_S
R3 R7 R45 = R: part number: R-2.49K,1/16W,52111037,+/-1%,R0402_S
R4 R58 = R: part number: R-TEST,**,NO_NUMBER,**,R_TEST
R5 R9 R10 R258 = R: part number: R-30K,1/16W,52111033,+/-1%,R0402_S
R6 = R: part number: R-51K,1/16W,52111042,+/-1%,R0402_S
R11-R13 R26-R28 R33-R40 R44 R46-R57 R59-R69 R71-R134 R177-R212 = R: part number: R-1K,1/16W,52010515,+/-1%,R0402_S
R14-R25 R29 R42 R43 R136-R139 R160 R163-R167 R169-R176 = R: part number: R-0,1/16W,52171000,+/-1%,R0402_S
R30 R32 = R: part number: R-4.99K,1/16W,52010531,+-1%,R0402_S
R31 R135 = R: part number: R-100K,1/16W,52111060,+/-1%,R0402_S
R70 R162 R168 = R: part number: R-100,1/16W,52111000,+/-1%,R0402_S
R140-R159 R213-R232 = R: part number: R-NC,**,NO_NUMBER,**,R0402_S
U1 U9 = TI_TPS54620RGY: part number: TI_TPS54620RGY-37010133,TI_PVQFN_N14_S,TPS54620RGY,TI,TPS54620RGY
U2 U3 = SPX_SP3077EEN: part number: SPX_SP3077EEN-**,SPX_NSOIC8_S,SP3077EEN,SIPEX,SP3077EEN
U4 = SIL_SI53340: part number: SIL_SI53340-********,SIL_QFN16_3X3MM_S,8SLVD1204-33,RENESAS,8SLVD1204-33
X1 X2 X19 X20 = TYCO_1_1469491_X: part number: TYCO_1_1469491_X-**,1-1469491-2,1_1469491_X_T,TYCO,1-1469491-2
XP1 XP2 = FPGA_JTAG_SMT: part number: FPGA_JTAG_SMT-JTAG_14P_SMT,STC_TSM_107_01_DV_S,********,**
XS1 XS4 = 406549_1: part number: 406549_1-TYCO_406549_1_T,RJ45_LED_1X1_UP,********,TJT,RJ45_LED_1X1_UP; room: *
XS3 = STD_SMA_5PIN: part number: STD_SMA_5PIN-********,STD_SMA_5P_01_DIP,SMA,**

## Footprints (pads in the part's own frame, mm; a bottom-side part is the same pattern mirrored in y, then rotated)
1_1469491_X_T
  round 2.6 hole 2.55: (3.352,0)
  round 9 hole 5.15: 1(0,0)
1410140_1_T
  round 1.02 hole 0.56: A1(-13.5,-7.2) A2(-11.7,-7.2) A3(-9.9,-7.2) A4(-8.1,-7.2) A5(-6.3,-7.2) A6(-4.5,-7.2) A7(-2.7,-7.2) A8(-0.9,-7.2) A9(0.9,-7.2) A10(2.7,-7.2) A11(4.5,-7.2) A12(6.3,-7.2) A13(8.1,-7.2) A14(9.9,-7.2) A15(11.7,-7.2) A16(13.5,-7.2) B1(-13.5,-5.4) B2(-11.7,-5.4) B3(-9.9,-5.4) B4(-8.1,-5.4) B5(-6.3,-5.4) B6(-4.5,-5.4) B7(-2.7,-5.4) B8(-0.9,-5.4) B9(0.9,-5.4) B10(2.7,-5.4) B11(4.5,-5.4) B12(6.3,-5.4) B13(8.1,-5.4) B14(9.9,-5.4) B15(11.7,-5.4) B16(13.5,-5.4) C1(-13.5,-3.6) C2(-11.7,-3.6) C3(-9.9,-3.6) C4(-8.1,-3.6) C5(-6.3,-3.6) C6(-4.5,-3.6) C7(-2.7,-3.6) C8(-0.9,-3.6) C9(0.9,-3.6) C10(2.7,-3.6) C11(4.5,-3.6) C12(6.3,-3.6) C13(8.1,-3.6) C14(9.9,-3.6) C15(11.7,-3.6) C16(13.5,-3.6) D1(-13.5,-1.8) D2(-11.7,-1.8) D3(-9.9,-1.8) D4(-8.1,-1.8) D5(-6.3,-1.8) D6(-4.5,-1.8) D7(-2.7,-1.8) D8(-0.9,-1.8) D9(0.9,-1.8) D10(2.7,-1.8) D11(4.5,-1.8) D12(6.3,-1.8) D13(8.1,-1.8) D14(9.9,-1.8) D15(11.7,-1.8) D16(13.5,-1.8) E1(-13.5,0) E2(-11.7,0) E3(-9.9,0) E4(-8.1,0) E5(-6.3,0) E6(-4.5,0) E7(-2.7,0) E8(-0.9,0) E9(0.9,0) E10(2.7,0) E11(4.5,0) E12(6.3,0) E13(8.1,0) E14(9.9,0) E15(11.7,0) E16(13.5,0) F1(-13.5,1.8) F2(-11.7,1.8) F3(-9.9,1.8) F4(-8.1,1.8) F5(-6.3,1.8) F6(-4.5,1.8) F7(-2.7,1.8) F8(-0.9,1.8) F9(0.9,1.8) F10(2.7,1.8) F11(4.5,1.8) F12(6.3,1.8) F13(8.1,1.8) F14(9.9,1.8) F15(11.7,1.8) F16(13.5,1.8) G1(-13.5,3.6) G2(-11.7,3.6) G3(-9.9,3.6) G4(-8.1,3.6) G5(-6.3,3.6) G6(-4.5,3.6) G7(-2.7,3.6) G8(-0.9,3.6) G9(0.9,3.6) G10(2.7,3.6) G11(4.5,3.6) G12(6.3,3.6) G13(8.1,3.6) G14(9.9,3.6) G15(11.7,3.6) G16(13.5,3.6) H1(-13.5,5.4) H2(-11.7,5.4) H3(-9.9,5.4) H4(-8.1,5.4) H5(-6.3,5.4) H6(-4.5,5.4) H7(-2.7,5.4) H8(-0.9,5.4) H9(0.9,5.4) H10(2.7,5.4) H11(4.5,5.4) H12(6.3,5.4) H13(8.1,5.4) H14(9.9,5.4) H15(11.7,5.4) H16(13.5,5.4) I1(-13.5,7.2) I2(-11.7,7.2) I3(-9.9,7.2) I4(-8.1,7.2) I5(-6.3,7.2) I6(-4.5,7.2) I7(-2.7,7.2) I8(-0.9,7.2) I9(0.9,7.2) I10(2.7,7.2) I11(4.5,7.2) I12(6.3,7.2) I13(8.1,7.2) I14(9.9,7.2) I15(11.7,7.2) I16(13.5,7.2)
1410142_1_T
  round 1.45 hole 1.45 unplated: (15.89,-2.7)
  round 1.02 hole 0.56: A1(-13.5,-7.2) A2(-11.7,-7.2) A3(-9.9,-7.2) A4(-8.1,-7.2) A5(-6.3,-7.2) A6(-4.5,-7.2) A7(-2.7,-7.2) A8(-0.9,-7.2) A9(0.9,-7.2) A10(2.7,-7.2) A11(4.5,-7.2) A12(6.3,-7.2) A13(8.1,-7.2) A14(9.9,-7.2) A15(11.7,-7.2) A16(13.5,-7.2) B1(-13.5,-5.4) B2(-11.7,-5.4) B3(-9.9,-5.4) B4(-8.1,-5.4) B5(-6.3,-5.4) B6(-4.5,-5.4) B7(-2.7,-5.4) B8(-0.9,-5.4) B9(0.9,-5.4) B10(2.7,-5.4) B11(4.5,-5.4) B12(6.3,-5.4) B13(8.1,-5.4) B14(9.9,-5.4) B15(11.7,-5.4) B16(13.5,-5.4) C1(-13.5,-3.6) C2(-11.7,-3.6) C3(-9.9,-3.6) C4(-8.1,-3.6) C5(-6.3,-3.6) C6(-4.5,-3.6) C7(-2.7,-3.6) C8(-0.9,-3.6) C9(0.9,-3.6) C10(2.7,-3.6) C11(4.5,-3.6) C12(6.3,-3.6) C13(8.1,-3.6) C14(9.9,-3.6) C15(11.7,-3.6) C16(13.5,-3.6) D1(-13.5,-1.8) D2(-11.7,-1.8) D3(-9.9,-1.8) D4(-8.1,-1.8) D5(-6.3,-1.8) D6(-4.5,-1.8) D7(-2.7,-1.8) D8(-0.9,-1.8) D9(0.9,-1.8) D10(2.7,-1.8) D11(4.5,-1.8) D12(6.3,-1.8) D13(8.1,-1.8) D14(9.9,-1.8) D15(11.7,-1.8) D16(13.5,-1.8) E1(-13.5,0) E2(-11.7,0) E3(-9.9,0) E4(-8.1,0) E5(-6.3,0) E6(-4.5,0) E7(-2.7,0) E8(-0.9,0) E9(0.9,0) E10(2.7,0) E11(4.5,0) E12(6.3,0) E13(8.1,0) E14(9.9,0) E15(11.7,0) E16(13.5,0) F1(-13.5,1.8) F2(-11.7,1.8) F3(-9.9,1.8) F4(-8.1,1.8) F5(-6.3,1.8) F6(-4.5,1.8) F7(-2.7,1.8) F8(-0.9,1.8) F9(0.9,1.8) F10(2.7,1.8) F11(4.5,1.8) F12(6.3,1.8) F13(8.1,1.8) F14(9.9,1.8) F15(11.7,1.8) F16(13.5,1.8) G1(-13.5,3.6) G2(-11.7,3.6) G3(-9.9,3.6) G4(-8.1,3.6) G5(-6.3,3.6) G6(-4.5,3.6) G7(-2.7,3.6) G8(-0.9,3.6) G9(0.9,3.6) G10(2.7,3.6) G11(4.5,3.6) G12(6.3,3.6) G13(8.1,3.6) G14(9.9,3.6) G15(11.7,3.6) G16(13.5,3.6) H1(-13.5,5.4) H2(-11.7,5.4) H3(-9.9,5.4) H4(-8.1,5.4) H5(-6.3,5.4) H6(-4.5,5.4) H7(-2.7,5.4) H8(-0.9,5.4) H9(0.9,5.4) H10(2.7,5.4) H11(4.5,5.4) H12(6.3,5.4) H13(8.1,5.4) H14(9.9,5.4) H15(11.7,5.4) H16(13.5,5.4) I1(-13.5,7.2) I2(-11.7,7.2) I3(-9.9,7.2) I4(-8.1,7.2) I5(-6.3,7.2) I6(-4.5,7.2) I7(-2.7,7.2) I8(-0.9,7.2) I9(0.9,7.2) I10(2.7,7.2) I11(4.5,7.2) I12(6.3,7.2) I13(8.1,7.2) I14(9.9,7.2) I15(11.7,7.2) I16(13.5,7.2)
1410186_1_T
  round 1.45 hole 1.45 unplated: (-7.69,-2.65)
  round 1.02 hole 0.56: A1(-6.3,-7.2) A2(-4.5,-7.2) A3(-2.7,-7.2) A4(-0.9,-7.2) A5(0.9,-7.2) A6(2.7,-7.2) A7(4.5,-7.2) A8(6.3,-7.2) B1(-6.3,-5.4) B2(-4.5,-5.4) B3(-2.7,-5.4) B4(-0.9,-5.4) B5(0.9,-5.4) B6(2.7,-5.4) B7(4.5,-5.4) B8(6.3,-5.4) C1(-6.3,-3.6) C2(-4.5,-3.6) C3(-2.7,-3.6) C4(-0.9,-3.6) C5(0.9,-3.6) C6(2.7,-3.6) C7(4.5,-3.6) C8(6.3,-3.6) D1(-6.3,-1.8) D2(-4.5,-1.8) D3(-2.7,-1.8) D4(-0.9,-1.8) D5(0.9,-1.8) D6(2.7,-1.8) D7(4.5,-1.8) D8(6.3,-1.8) E1(-6.3,0) E2(-4.5,0) E3(-2.7,0) E4(-0.9,0) E5(0.9,0) E6(2.7,0) E7(4.5,0) E8(6.3,0) F1(-6.3,1.8) F2(-4.5,1.8) F3(-2.7,1.8) F4(-0.9,1.8) F5(0.9,1.8) F6(2.7,1.8) F7(4.5,1.8) F8(6.3,1.8) G1(-6.3,3.6) G2(-4.5,3.6) G3(-2.7,3.6) G4(-0.9,3.6) G5(0.9,3.6) G6(2.7,3.6) G7(4.5,3.6) G8(6.3,3.6) H1(-6.3,5.4) H2(-4.5,5.4) H3(-2.7,5.4) H4(-0.9,5.4) H5(0.9,5.4) H6(2.7,5.4) H7(4.5,5.4) H8(6.3,5.4) I1(-6.3,7.2) I2(-4.5,7.2) I3(-2.7,7.2) I4(-0.9,7.2) I5(0.9,7.2) I6(2.7,7.2) I7(4.5,7.2) I8(6.3,7.2)
AC_CONN_3
  oval 1.5x3.5 hole 1x3: 1(0,0) 3(-6.299,0)
  oval 3.7x1.5 hole 3x0.8: 2(-3,-4.6)
C0402_S
  rect 0.55x0.55 smd: 1(-0.45,0) 2(0.45,0)
C0805_S
  rect 1.143x1.27 smd: 1(-0.939,0) 2(0.939,0)
CETC_0530_S
  rect 1.75x2.5 smd: 1(-2.12,0) 2(2.12,0)
EVLT_19_217_S
  rect 0.8x0.8 smd: 1(-0.749,0) 2(0.749,0)
MUR_BLM18_S
  rect 1.2x1 smd: 1(-0.8,0) 2(0.8,0)
NXP_SOT23_S
  rect 0.6x0.8 smd: 1(-0.95,-1.05) 2(0.95,-1.05) 3(0,1.05)
R0402_S
  rect 0.55x0.55 smd: 1(-0.45,0) 2(0.45,0)
R_TEST
  rect 1.2x1.8 smd: 1(-0.7,0) 2(0.7,0)
SIL_QFN16_3X3MM_S
  rect 0.787x0.279 smd: 1(-1.5,0.75) 2(-1.5,0.25) 3(-1.5,-0.25) 4(-1.5,-0.75) 9(1.5,-0.75) 10(1.5,-0.25) 11(1.5,0.25) 12(1.5,0.75)
  rect 0.279x0.787 smd: 5(-0.75,-1.5) 6(-0.25,-1.5) 7(0.25,-1.5) 8(0.75,-1.5) 13(0.75,1.5) 14(0.25,1.5) 15(-0.25,1.5) 16(-0.75,1.5)
  rect 1.727x1.727 smd: 17(0,0)
SIT_3225_S
  rect 1x1.05 smd: 1(-1.125,-0.8) 3(1.125,-0.8) 4(1.125,0.8) 6(-1.125,0.8)
  rect 0.6x1.05 smd: 2(0,-0.8) 5(0,0.8)
SPX_NSOIC8_S
  rect 2.3x0.66 smd: 1(-2.795,1.905) 2(-2.795,0.635) 3(-2.795,-0.635) 4(-2.795,-1.905) 5(2.795,-1.905) 6(2.795,-0.635) 7(2.795,0.635) 8(2.795,1.905)
SPX_TSSOP16_S
  oval 1.549x0.399 smd: 1(-2.901,2.276) 2(-2.901,1.626) 3(-2.901,0.975) 4(-2.901,0.325) 5(-2.901,-0.325) 6(-2.901,-0.975) 7(-2.901,-1.626) 8(-2.901,-2.276) 9(2.901,-2.276) 10(2.901,-1.626) 11(2.901,-0.975) 12(2.901,-0.325) 13(2.901,0.325) 14(2.901,0.975) 15(2.901,1.626) 16(2.901,2.276)
STC_TSM_107_01_DV_S
  rect 1.27x3.17 smd: 1(-7.62,-2.73) 2(-7.62,2.73) 3(-5.08,-2.73) 4(-5.08,2.73) 5(-2.54,-2.73) 6(-2.54,2.73) 7(0,-2.73) 8(0,2.73) 9(2.54,-2.73) 10(2.54,2.73) 11(5.08,-2.73) 12(5.08,2.73) 13(7.62,-2.73) 14(7.62,2.73)
STD_2P54_1X2_DIP
  rect 1.5x1.5 hole 1: 1(0,0)
  round 1.524 hole 1: 2(2.54,0)
STD_2P54_1X3_DIP
  rect 1.524x1.524 hole 1.016: 1(0,0)
  round 1.524 hole 1.016: 2(2.54,0) 3(5.08,0)
STD_SMA_5P_01_DIP
  round 2.301 hole 1.699: 1(0,0) 2(-2.54,2.54) 3(2.54,2.54) 4(-2.54,-2.54) 5(2.54,-2.54)
TI_PVQFN_N14_S
  rect 0.85x0.3 smd: 1(-1.725,-0.75) 7(1.725,-0.75) 8(1.725,0.75) 14(-1.725,0.75)
  rect 0.3x0.85 smd: 2(-1,-1.725) 3(-0.5,-1.725) 4(0,-1.725) 5(0.5,-1.725) 6(1,-1.725) 9(1,1.725) 10(0.5,1.725) 11(0,1.725) 12(-0.5,1.725) 13(-1,1.725)
  rect 2.05x2.05 smd: 15(0,0)
TYCO_406549_1_T
  round 0 hole 3.25 unplated: (-2.78,-4.32) (9.92,-4.32)
  rect 1.5x1.5 hole 0.9: 1(7.14,-1.78)
  round 1.5 hole 0.89: 2(6.12,0) 3(5.1,-1.78) 4(4.08,0) 5(3.06,-1.78) 6(2.04,0) 7(1.02,-1.78) 8(0,0)
  round 1.801 hole 1.1: 9(8.14,4.82) 10(10.43,4.82) 11(-3.29,4.82) 12(-1,4.82)
  round 3.2 hole 1.8: 15(-4.56,-0.89) 16(11.7,-0.89)
unnamed
  round 1.016 smd: 1(0,0)

## Nets
+5V_VPX: R58.2(B0) SP0.A1 SP0.A2 SP0.A3 SP0.B1 SP0.B2 SP0.B3 SP0.C1 SP0.C2 SP0.C3 SP0.D1 SP0.D2 SP0.D3
+5V_VPX_K: J4.A1 J4.A2 J4.A3 J4.B1 J4.B2 J4.B3 J4.C1 J4.C2 J4.C3 J4.D1 J4.D2 J4.D3
+12V_VPX: C1.2(B0) C10.2(B0) C11.2(B0) C13.2(B0) C47.2(B0) C51.2(B0) C53.2(B0) C54.2(B0) C127.2(B0) C128.2(B0) C129.2(B0) C875.2(B0) CN1.1 J4.F1 J4.F2 J4.F3 J4.G1 J4.G2 J4.G3 J4.H1 J4.H2 J4.H3 J4.I1 J4.I2 J4.I3 R5.2(B0) R9.2(B0) R10.2(B0) R258.2(B0) SP0.F1 SP0.F2 SP0.F3 SP0.G1 SP0.G2 SP0.G3 SP0.H1 SP0.H2 SP0.H3 SP0.I1 SP0.I2 SP0.I3 U1.4 U1.5 U1.6 U9.4 U9.5 U9.6
D3V3: C15.2(B0) C16.2(B0) C21.1(A0) C22.1(A0) C27.1(A0) D33.16(VCC) J10.1 L2.1(P1) L3.1(P1) R4.2(B0) R31.2(B0) R35.1(A0) R135.2(B0) R212.1(A0) U2.1(VCC) U3.1(VCC) XP1.2 XP2.2
GND: C1.1(A0) C3.1(A0) C4.1(A0) C5.1(A0) C6.1(A0) C7.1(A0) C8.1(A0) C9.1(A0) C10.1(A0) C11.1(A0) C12.1(A0) C13.1(A0) C14.1(A0) C15.1(A0) C16.1(A0) C19.1(A0) C20.1(A0) C21.2(B0) C22.2(B0) C23.1(A0) C24.1(A0) C25.1(A0) C27.2(B0) C47.1(A0) C51.1(A0) C53.1(A0) C54.1(A0) C59.1(A0) C63.1(A0) C77.1(A0) C79.1(A0) C81.1(A0) C83.1(A0) C85.1(A0) C87.1(A0) C127.1(A0) C128.1(A0) C129.1(A0) C875.1(A0) CN1.2 CN1.3 D1.1 D2.1 D3.1 D4.1 D5.1 D6.1 D8.1 D9.1 D10.1 D11.1 D12.1 D13.1 D14.1 D15.1 D16.1 D17.1 D18.1 D19.1 D20.1 D21.1 D22.1 D23.1 D24.1 D25.1 D26.1 D27.1 D28.1 D29.1 D30.1 D31.1 D32.1 D33.15(GND) D34.1 D35.1 D36.1 D37.1 D38.1 D39.1 D40.1 D41.1 D42.1 D43.1 D44.1 D45.1 D46.1 D47.1 D48.1 D49.1 D50.1 D51.1 D52.1 D53.1 D54.1 D55.1 D56.1 D57.1 D58.1 D59.1 D60.1 D61.1 D62.1 D63.1 D64.1 D65.1 D66.1 D67.1 D68.1 D69.1 D70.1 D71.1 D72.1 D73.1 D74.1 D75.1 D76.1 D77.1 D78.1 D79.1 D80.1 D81.1 D82.1 D83.1 D84.1 D85.1 D86.1 D87.1 D88.1 D89.1 D90.1 D91.1 D92.1 D93.1 D94.1 D95.1 D96.1 D97.1 D98.1 D99.1 D100.1 D101.1 D102.1 D103.1 D104.1 D105.1 D106.1 D107.1 D109.1 D110.1 D111.1 D112.1 D113.1 D114.1 D115.1 D116.1 D117.1 D118.1 D119.1 D120.1 D121.1 D122.1 D123.1 D124.1 D125.1 D126.1 D127.1 D128.1 D129.1 D130.1 D131.1 D132.1 D133.1 D134.1 D135.1 D136.1 D137.1 D138.1 GJ1.3(GND) J1.2 J2.3 J3.2 J4.A4 J4.A5 J4.A6 J4.A8 J4.B8 J4.C7 J4.D4 J4.D5 J4.D6 J4.D7 J4.E8 J4.F4 J4.F5 J4.F6 J4.F8 J4.G7 J4.H7 J4.I4 J4.I5 J4.I6 J4.I8 J5.A2 J5.A4 J5.A6 J5.A8 J5.A10 J5.A12 J5.A14 J5.A16 J5.B2 J5.B4 J5.B6 J5.B8 J5.B10 J5.B12 J5.B14 J5.B16 J5.C1 J5.C3 J5.C5 J5.C7 J5.C9 J5.C11 J5.C13 J5.C15 J5.D1 J5.D3 J5.D5 J5.D7 J5.D9 J5.D11 J5.D13 J5.D15 J5.E2 J5.E4 J5.E6 J5.E8 J5.E10 J5.E12 J5.E14 J5.E16 J5.F2 J5.F4 J5.F6 J5.F8 J5.F10 J5.F12 J5.F14 J5.F16 J5.G1 J5.G3 J5.G5 J5.G7 J5.G9 J5.G11 J5.G13 J5.G15 J5.H1 J5.H3 J5.H5 J5.H7 J5.H9 J5.H11 J5.H13 J5.H15 J5.I2 J5.I4 J5.I6 J5.I8 J5.I10 J5.I12 J5.I14 J5.I16 J6.A2 J6.A4 J6.A6 J6.A8 J6.A10 J6.A12 J6.A14 J6.A16 J6.B2 J6.B4 J6.B6 J6.B8 J6.B10 J6.B12 J6.B14 J6.B16 J6.C1 J6.C3 J6.C5 J6.C7 J6.C9 J6.C11 J6.C13 J6.C15 J6.D1 J6.D3 J6.D5 J6.D7 J6.D9 J6.D11 J6.D13 J6.D15 J6.E2 J6.E4 J6.E6 J6.E8 J6.E10 J6.E12 J6.E14 J6.E16 J6.F2 J6.F4 J6.F6 J6.F8 J6.F10 J6.F12 J6.F14 J6.F16 J6.G1 J6.G3 J6.G5 J6.G7 J6.G9 J6.G11 J6.G13 J6.G15 J6.H1 J6.H3 J6.H5 J6.H7 J6.H9 J6.H11 J6.H13 J6.H15 J6.I2 J6.I4 J6.I6 J6.I8 J6.I10 J6.I12 J6.I14 J6.I16 J7.3 J12.2 J13.2 J21.2 J29.2 J32.2 J35.2 J36.3 Q1.2 Q2.2 R1.1(A0) R2.1(A0) R8.1(A0) R32.1(A0) R41.1(A0) R44.2(B0) R160.1(A0) R271.1(A0) SP0.A4 SP0.A5 SP0.A6 SP0.A8 SP0.B8 SP0.C7 SP0.D4 SP0.D5 SP0.D6 SP0.D7 SP0.E8 SP0.F4 SP0.F5 SP0.F6 SP0.F8 SP0.G7 SP0.H7 SP0.I4 SP0.I5 SP0.I6 SP0.I8 SP1.A2 SP1.A4 SP1.A6 SP1.A8 SP1.A10 SP1.A12 SP1.A14 SP1.A16 SP1.B2 SP1.B4 SP1.B6 SP1.B8 SP1.B10 SP1.B12 SP1.B14 SP1.B16 SP1.C1 SP1.C3 SP1.C5 SP1.C7 SP1.C9 SP1.C11 SP1.C13 SP1.C15 SP1.D1 SP1.D3 SP1.D5 SP1.D7 SP1.D9 SP1.D11 SP1.D13 SP1.D15 SP1.E2 SP1.E4 SP1.E6 SP1.E8 SP1.E10 SP1.E12 SP1.E14 SP1.E16 SP1.F2 SP1.F4 SP1.F6 SP1.F8 SP1.F10 SP1.F12 SP1.F14 SP1.F16 SP1.G1 SP1.G3 SP1.G5 SP1.G7 SP1.G9 SP1.G11 SP1.G13 SP1.G15 SP1.H1 SP1.H3 SP1.H5 SP1.H7 SP1.H9 SP1.H11 SP1.H13 SP1.H15 SP1.I2 SP1.I4 SP1.I6 SP1.I8 SP1.I10 SP1.I12 SP1.I14 SP1.I16 SP2.A2 SP2.A4 SP2.A6 SP2.A8 SP2.A10 SP2.A12 SP2.A14 SP2.A16 SP2.B2 SP2.B4 SP2.B6 SP2.B8 SP2.B10 SP2.B12 SP2.B14 SP2.B16 SP2.C1 SP2.C3 SP2.C5 SP2.C7 SP2.C9 SP2.C11 SP2.C13 SP2.C15 SP2.D1 SP2.D3 SP2.D5 SP2.D7 SP2.D9 SP2.D11 SP2.D13 SP2.D15 SP2.E2 SP2.E4 SP2.E6 SP2.E8 SP2.E10 SP2.E12 SP2.E14 SP2.E16 SP2.F2 SP2.F4 SP2.F6 SP2.F8 SP2.F10 SP2.F12 SP2.F14 SP2.F16 SP2.G1 SP2.G3 SP2.G5 SP2.G7 SP2.G9 SP2.G11 SP2.G13 SP2.G15 SP2.H1 SP2.H3 SP2.H5 SP2.H7 SP2.H9 SP2.H11 SP2.H13 SP2.H15 SP2.I2 SP2.I4 SP2.I6 SP2.I8 SP2.I10 SP2.I12 SP2.I14 SP2.I16 U1.2 U1.3 U1.15 U2.4(GND) U3.4(GND) U4.1(GND) U4.17(GND_PAD) U9.2 U9.3 U9.15 X1.1(9) X2.1(9) X19.1(9) X20.1(9) XP1.1 XP1.3 XP1.5 XP1.7 XP1.9 XP1.11 XP1.13 XP2.1 XP2.3 XP2.5 XP2.7 XP2.9 XP2.11 XP2.13 XS1.15(SHIELD1) XS1.16(SHIELD2) XS3.2(GND<0>) XS3.3(GND<1>) XS3.4(GND<2>) XS3.5(GND<3>) XS4.15(SHIELD1) XS4.16(SHIELD2)
VDD_JTAG_KU: J4.E1 J4.E2 J4.E3
VDD_JTAG_P: SP0.E1 SP0.E2 SP0.E3
1PPS_GPS_INT: J10.2 R44.1(A0) SP2.H14
1PPS_GPS_INT_KU: J6.H14 R102.1(A0)
CURRENT_DOWN_PA_P: J24.2 SP1.I11
CURRENT_UP_PA_P: J24.1 SP1.I9
DATA0_RF_KU: J5.F11 R124.1(A0)
DATA1_RF_KU: J5.I11 R205.1(A0)
DATA2_RF_KU: J5.C12 R73.1(A0)
DATA3_RF_KU: J5.D12 R99.1(A0)
DATA4_RF_KU: J5.G12 R125.1(A0)
DATA5_RF_KU: J5.H12 R206.1(A0)
DATA_GPS_INT: J13.1 SP2.G14
DATA_GPS_INT_KU: J6.G14 R127.1(A0)
DI+_SRIO_KU: J5.E9 R175.2(B0)
DI-_SRIO_KU: J5.F9 R176.2(B0)
DO+_SRIO_KU: J5.A9 R175.1(A0)
DO-_SRIO_KU: J5.B9 R176.1(A0)
EN_FIBER: J5.I9 R132.1(A0)
ETH_TD1+_KU: J5.A15 XS4.1
ETH_TD1+_P: SP1.A15 XS1.1
ETH_TD1-_KU: J5.B15 XS4.2
ETH_TD1-_P: SP1.B15 XS1.2
ETH_TD2+_KU: J5.E15 XS4.3
ETH_TD2+_P: SP1.E15 XS1.3
ETH_TD2-_KU: J5.F15 XS4.6
ETH_TD2-_P: SP1.F15 XS1.6
ETH_TD3+_KU: J5.C16 XS4.4
ETH_TD3+_P: SP1.C16 XS1.4
ETH_TD3-_KU: J5.D16 XS4.5
ETH_TD3-_P: SP1.D16 XS1.5
ETH_TD4+_KU: J5.G16 XS4.7
ETH_TD4+_P: SP1.G16 XS1.7
ETH_TD4-_KU: J5.H16 XS4.8
ETH_TD4-_P: SP1.H16 XS1.8
GA0_KU: J4.G5 R80.1(A0)
GA0_P: J29.1 SP0.G5
GA1_KU: J4.H5 R106.1(A0)
GA1_P: J35.1 SP0.H5
GAIN0_RX_RF_KU: J5.F13 R96.1(A0)
GAIN1_RX_RF_KU: J5.I13 R122.1(A0)
GAIN2_RX_RF_KU: J5.C14 R203.1(A0)
GAIN3_RX_RF_KU: J5.D14 R71.1(A0)
GAIN4_RX_RF_KU: J5.G14 R97.1(A0)
GAIN5_RX_RF_KU: J5.H14 R123.1(A0)
GAIN6_RX_RF_KU: J5.I15 R204.1(A0)
GPIO0_EXT_KU: J6.D12 R110.1(A0)
GPIO0_EXT_P: R34.1(A0) SP2.D12
GPIO0_MAIN_P_KU: R47.1(A0) SP1.H2
GPIO0_MAIN_P_KU_K: J5.H2 R46.1(A0)
GPIO0_NET_KU: J5.I1 R209.1(A0)
GPIO0_NET_P: R12.1(A0) SP1.I1
GPIO1_EXT_KU: J6.G12 R182.1(A0)
GPIO1_EXT_P: R40.1(A0) SP2.G12
GPIO1_MAIN_P_KU: R49.1(A0) SP1.I3
GPIO1_MAIN_P_KU_K: J5.I3 R77.1(A0)
GPIO1_NET_KU: J5.C2 R79.1(A0)
GPIO1_NET_P: R26.1(A0) SP1.C2
GPIO2_EXT_KU: J6.H12 R183.1(A0)
GPIO2_EXT_P: R48.1(A0) SP2.H12
GPIO2_MAIN_P_KU: R53.1(A0) SP1.I5
GPIO2_MAIN_P_KU_K: J5.I5 R103.1(A0)
GPIO2_NET_KU: J5.D2 R105.1(A0)
GPIO2_NET_P: R33.1(A0) SP1.D2
GPIO3_EXT_KU: J6.A13 R83.1(A0)
GPIO3_EXT_P: R50.1(A0) SP2.A13
GPIO3_MAIN_P_KU: R55.1(A0) SP1.C8
GPIO3_MAIN_P_KU_K: J5.C8 R128.1(A0)
GPIO3_NET_KU: J5.G2 R130.1(A0)
GPIO3_NET_P: R39.1(A0) SP1.G2
GPIO4_EXT_KU: J6.B13 R111.1(A0)
GPIO4_EXT_P: R54.1(A0) SP2.B13
GPIO4_MAIN_P_KU: R66.1(A0) SP1.D8
GPIO4_MAIN_P_KU_K: J5.D8 R208.1(A0)
GPIO5_EXT_KU: J6.E13 R11.1(A0)
GPIO5_EXT_P: R56.1(A0) SP2.E13
GPIO5_MAIN_P_KU: R68.1(A0) SP1.G8
GPIO5_MAIN_P_KU_K: J5.G8 R78.1(A0)
GPIO6_EXT_KU: J6.F13 R184.1(A0)
GPIO6_EXT_P: R67.1(A0) SP2.F13
GPIO6_MAIN_P_KU: R13.1(A0) SP1.H8
GPIO6_MAIN_P_KU_K: J5.H8 R104.1(A0)
GPIO7_EXT_KU: J6.I13 R84.1(A0)
GPIO7_EXT_P: R69.1(A0) SP2.I13
GPIO7_MAIN_P_KU: R27.1(A0) SP1.I7
GPIO7_MAIN_P_KU_K: J5.I7 R129.1(A0)
GPIO_RF_KU: J5.E13 R202.1(A0)
IND_PWROFF_KU: J4.H4 J12.1
IND_PWROFF_P: J3.1 SP0.H4
KIND0_KU: J6.B15 R112.1(A0)
KIND1_KU: J6.A15 R185.1(A0)
KIND2_KU: J6.H16 R186.1(A0)
KIND3_KU: J6.G16 R85.1(A0)
LED0_FRONTPANEL: J6.I15 R187.1(A0)
LED1_FRONTPANEL: J6.C16 R86.1(A0)
LED2_FRONTPANEL: R51.1(A0) SP2.I15
LED3_FRONTPANEL: R52.1(A0) SP2.C16
MIO5_7100_TO_TEST: J6.E15
OP_MODE_2_KU115_TO_TEST: J6.F15
PWM1_FAN: J4.D8 R131.1(A0)
PWM2_FAN: J4.A7 R210.1(A0)
PWR_DOWN_PA_P: J22.2 SP1.E11
PWR_UP_PA_P: J25.2 SP1.F11
PWRTX0_RF_KU: J5.D10 R74.1(A0)
PWRTX1_RF_KU: J5.G10 R100.1(A0)
PWRTX2_RF_KU: J5.H10 R126.1(A0)
PWRTX3_RF_KU: J5.A11 R207.1(A0)
PWRTX4_RF_KU: J5.B11 R75.1(A0)
PWRTX5_RF_KU: J5.E11 R101.1(A0)
RDY_PWROFF_KU: J4.G4 Q2.1 R135.1(A0)
RDY_PWROFF_P: Q1.1 R31.1(A0) SP0.G4
REFCLK+_KU: J4.G8 U4.9(Q0)
REFCLK+_P: SP0.G8 U4.13(Q2)
REFCLK-_KU: J4.H8 U4.10(Q0B)
REFCLK-_P: SP0.H8 U4.14(Q2B)
RES0_KU: J4.B4 R108.1(A0)
RES0_P: R57.1(A0) SP0.B4
RES1_KU: J4.C5 R177.1(A0)
RES1_P: R59.1(A0) SP0.C5
RES2_KU: J4.B5 R178.1(A0)
RES2_P: R60.1(A0) SP0.B5
RES3_KU: J4.C6 R179.1(A0)
RES3_P: R61.1(A0) SP0.C6
RES4_KU: J4.B6 R109.1(A0)
RES4_P: R62.1(A0) SP0.B6
RES5_KU: J4.H6 R180.1(A0)
RES5_P: R63.1(A0) SP0.H6
RES6_KU: J4.G6 R181.1(A0)
RES6_P: R64.1(A0) SP0.G6
RES7_KU: J4.C8 R82.1(A0)
RES7_P: R65.1(A0) SP0.C8
RESET_INT_RF_KU: J5.C10 R76.1(A0)
RESET_KU: J1.1 J4.C4
RESET_P: J21.1 SP0.C4
RX0+_RS422_KU: J6.C2 R171.2(B0)
RX0-_RS422_KU: J6.D2 R172.2(B0)
RX1+_RS422_KU: J6.G2 R173.2(B0)
RX1-_RS422_KU: J6.H2 R174.2(B0)
RX+_RS422_P: R42.2(B0) SP2.C2
RX-_RS422_P: R43.2(B0) SP2.D2
RX_DEBUG_RS232_KU: D33.7(T2OUT) J6.I3
RX_DEBUG_RS232_P: D33.14(T1OUT) SP2.I3
RX_PA1_KU: J6.D4 R133.1(A0)
RX_PA2_KU: J6.G4 R211.1(A0)
RX_PA3_KU: J6.H4 R81.1(A0)
RX_PA4_KU: J6.A5 R107.1(A0)
RX_PA5_KU: J6.B5 R134.1(A0)
SRIO0+_MAIN_KU2P: R16.2(B0) R223.2(B0) SP1.E5
SRIO0+_MAIN_KU2P_K: J5.E5 R29.2(B0) R150.1(A0)
SRIO0+_MAIN_P2KU: R16.1(A0) R213.1(A0) SP1.E3
SRIO0+_MAIN_P2KU_K: J5.E3 R29.1(A0) R140.2(B0)
SRIO0-_MAIN_KU2P: R17.2(B0) R224.2(B0) SP1.F5
SRIO0-_MAIN_KU2P_K: J5.F5 R136.2(B0) R151.1(A0)
SRIO0-_MAIN_P2KU: R17.1(A0) R214.1(A0) SP1.F3
SRIO0-_MAIN_P2KU_K: J5.F3 R136.1(A0) R141.2(B0)
SRIO1+_MAIN_KU2P: R18.2(B0) R225.2(B0) SP1.A5
SRIO1+_MAIN_KU2P_K: J5.A5 R137.2(B0) R152.1(A0)
SRIO1+_MAIN_P2KU: R18.1(A0) R215.1(A0) SP1.A3
SRIO1+_MAIN_P2KU_K: J5.A3 R137.1(A0) R142.2(B0)
SRIO1-_MAIN_KU2P: R19.2(B0) R226.2(B0) SP1.B5
SRIO1-_MAIN_KU2P_K: J5.B5 R138.2(B0) R153.1(A0)
SRIO1-_MAIN_P2KU: R19.1(A0) R216.1(A0) SP1.B3
SRIO1-_MAIN_P2KU_K: J5.B3 R138.1(A0) R143.2(B0)
SRIO2+_MAIN_KU2P: R20.2(B0) R227.2(B0) SP1.G6
SRIO2+_MAIN_KU2P_K: J5.G6 R139.2(B0) R154.1(A0)
SRIO2+_MAIN_P2KU: R20.1(A0) R217.1(A0) SP1.G4
SRIO2+_MAIN_P2KU_K: J5.G4 R139.1(A0) R144.2(B0)
SRIO2-_MAIN_KU2P: R21.2(B0) R228.2(B0) SP1.H6
SRIO2-_MAIN_KU2P_K: J5.H6 R155.1(A0) R163.2(B0)
SRIO2-_MAIN_P2KU: R21.1(A0) R218.1(A0) SP1.H4
SRIO2-_MAIN_P2KU_K: J5.H4 R145.2(B0) R163.1(A0)
SRIO3+_MAIN_KU2P: R22.2(B0) R229.2(B0) SP1.C6
SRIO3+_MAIN_KU2P_K: J5.C6 R156.1(A0) R164.2(B0)
SRIO3+_MAIN_P2KU: R22.1(A0) R219.1(A0) SP1.C4
SRIO3+_MAIN_P2KU_K: J5.C4 R146.2(B0) R164.1(A0)
SRIO3-_MAIN_KU2P: R23.2(B0) R230.2(B0) SP1.D6
SRIO3-_MAIN_KU2P_K: J5.D6 R157.1(A0) R165.2(B0)
SRIO3-_MAIN_P2KU: R23.1(A0) R220.1(A0) SP1.D4
SRIO3-_MAIN_P2KU_K: J5.D4 R147.2(B0) R165.1(A0)
SRIO+_AUX_KU2P: R24.2(B0) R231.2(B0) SP1.A7
SRIO+_AUX_KU2P_K: J5.A7 R158.1(A0) R166.2(B0)
SRIO+_AUX_P2KU: R24.1(A0) R221.1(A0) SP1.E7
SRIO+_AUX_P2KU_K: J5.E7 R148.2(B0) R166.1(A0)
SRIO+_KU2NET: J5.A1 R169.1(A0)
SRIO+_NET2KU: J5.E1 R169.2(B0)
SRIO+_NET2P: R14.1(A0) SP1.E1
SRIO+_P2NET: R14.2(B0) SP1.A1
SRIO-_AUX_KU2P: R25.2(B0) R232.2(B0) SP1.B7
SRIO-_AUX_KU2P_K: J5.B7 R159.1(A0) R167.2(B0)
SRIO-_AUX_P2KU: R25.1(A0) R222.1(A0) SP1.F7
SRIO-_AUX_P2KU_K: J5.F7 R149.2(B0) R167.1(A0)
SRIO-_KU2NET: J5.B1 R170.1(A0)
SRIO-_NET2KU: J5.F1 R170.2(B0)
SRIO-_NET2P: R15.1(A0) SP1.F1
SRIO-_P2NET: R15.2(B0) SP1.B1
SW0_SWITCH_KU: J6.F7 R113.1(A0)
SW1_SWITCH_KU: J6.I7 R188.1(A0)
SW2_SWITCH_KU: J6.C8 R189.1(A0)
SW3_SWITCH_KU: J6.D8 R87.1(A0)
SW4_SWITCH_KU: J6.G8 R114.1(A0)
SW5_SWITCH_KU: J6.H8 R190.1(A0)
SW6_SWITCH_KU: J6.A9 R191.1(A0)
SW7_SWITCH_KU: J6.B9 R88.1(A0)
SW8_SWITCH_KU: J6.E9 R115.1(A0)
SW9_SWITCH_KU: J6.F9 R192.1(A0)
SW10_SWITCH_KU: J6.I9 R193.1(A0)
SW11_SWITCH_KU: J6.C10 R89.1(A0)
SW12_SWITCH_KU: J6.D10 R116.1(A0)
SW13_SWITCH_KU: J6.G10 R28.1(A0)
SW14_SWITCH_KU: J6.H10 R194.1(A0)
SW15_SWITCH_KU: J6.A11 R90.1(A0)
SW16_SWITCH_KU: J6.B11 R117.1(A0)
SW17_SWITCH_KU: J6.E11 R195.1(A0)
SW18_SWITCH_KU: J6.F11 R196.1(A0)
SW19_SWITCH_KU: J6.I11 R91.1(A0)
SW20_SWITCH_KU: J6.C12 R118.1(A0)
SW+_DOWN_LNA_P: J46.1 SP1.C10
SW+_DOWN_PA_P: J44.1 SP1.A9
SW+_UP_LNA_P: J45.1 SP1.G10
SW+_UP_PA_P: J43.1 SP1.E9
SW-_DOWN_LNA_P: J46.2 SP1.D10
SW-_DOWN_PA_P: J44.2 SP1.B9
SW-_UP_LNA_P: J45.2 SP1.H10
SW-_UP_PA_P: J43.2 SP1.F9
SW_RX_PA1_KU: J6.G6 R199.1(A0)
SW_RX_PA2_KU: J6.H6 R93.1(A0)
SW_RX_PA3_KU: J6.A7 R200.1(A0)
SW_RX_PA4_KU: J6.B7 R94.1(A0)
SW_RX_PA5_KU: J6.E7 R120.1(A0)
SW_TX_PA1_KU: J6.E5 R197.1(A0)
SW_TX_PA2_KU: J6.F5 R198.1(A0)
SW_TX_PA3_KU: J6.I5 R92.1(A0)
SW_TX_PA4_KU: J6.C6 R119.1(A0)
SW_TX_PA5_KU: J6.D6 R36.1(A0)
SWR_DOWN_PA_P: J26.2 SP1.C12
SWR_UP_PA_P: J26.1 SP1.D12
TCK_JTAG_KU: J4.I7 XP2.6
TCK_JTAG_P: SP0.I7 XP1.6
TDI_JTAG_KU: J4.E7 XP2.10
TDI_JTAG_P: SP0.E7 XP1.10
TDO_JTAG_KU: J4.F7 XP2.8
TDO_JTAG_P: SP0.F7 XP1.8
TEMP_DOWN_PA_P: J23.2 SP1.A11
TEMP_UP_PA_P: J23.1 SP1.B11
TMS_JTAG_KU: J4.B7 XP2.4
TMS_JTAG_P: SP0.B7 XP1.4
TR0_RF_KU: J5.A13 R72.1(A0)
TR1_RF_KU: J5.B13 R98.1(A0)
TRX+_RS485_KU: J6.C14 J8.1
TRX-_RS485_KU: J6.D14 J8.2
TX0+_RS422_KU: J6.A1 R171.1(A0)
TX0-_RS422_KU: J6.B1 R172.1(A0)
TX1+_RS422_KU: J6.E1 R173.1(A0)
TX1-_RS422_KU: J6.F1 R174.1(A0)
TX+_RS422_P: R42.1(A0) SP2.A1
TX-_RS422_P: R43.1(A0) SP2.B1
TX_DEBUG_RS232_KU: D33.8(R2IN) J6.I1
TX_DEBUG_RS232_P: D33.13(R1IN) SP2.I1
TX_PA1_KU: J6.A3 R37.1(A0)
TX_PA2_KU: J6.B3 R201.1(A0)
TX_PA3_KU: J6.E3 R95.1(A0)
TX_PA4_KU: J6.F3 R121.1(A0)
TX_PA5_KU: J6.C4 R38.1(A0)
UNNAMED_1_C_I32_B0: C3.2(B0) U1.9
UNNAMED_1_C_I34_B0: C4.2(B0) R3.1(A0)
UNNAMED_1_C_I35_A0: C2.1(A0) U1.13
UNNAMED_1_C_I35_B0: C2.2(B0) L1.1(N1) U1.11 U1.12
UNNAMED_1_C_I39_B0: C63.2(B0) R45.1(A0)
UNNAMED_1_C_I40_B0: C59.2(B0) U9.9
UNNAMED_1_C_I41_A0: C58.1(A0) U9.13
UNNAMED_1_C_I41_B0: C58.2(B0) L9.1(N1) U9.11 U9.12
UNNAMED_1_C_I48_B0: C5.2(B0) C6.2(B0) C7.2(B0) C8.2(B0) C9.2(B0) C79.2(B0) L1.2(N2) R4.1(A0) R30.1(A0)
UNNAMED_1_C_I61_B0: C12.2(B0) C77.2(B0) C81.2(B0) C83.2(B0) C85.2(B0) C87.2(B0) L9.2(N2) R6.1(A0) R58.1(A0)
UNNAMED_1_R_I12_B0: R1.2(B0) R258.1(A0) U1.10
UNNAMED_1_R_I15_B0: R2.2(B0) U1.1
UNNAMED_1_R_I20_A0: R10.1(A0) U1.14
UNNAMED_1_R_I23_B0: R5.1(A0) R271.2(B0) U9.10
UNNAMED_1_R_I25_B0: R41.2(B0) U9.1
UNNAMED_1_R_I30_A0: R9.1(A0) U9.14
UNNAMED_1_R_I33_B0: R3.2(B0) U1.8
UNNAMED_1_R_I38_B0: R45.2(B0) U9.8
UNNAMED_1_R_I45_B0: R32.2(B0) R276.1(A0) U1.7
UNNAMED_1_R_I46_B0: R30.2(B0) R276.2(B0)
UNNAMED_1_R_I58_B0: R7.1(A0) R8.2(B0) U9.7
UNNAMED_1_R_I59_B0: R6.2(B0) R7.2(B0)
UNNAMED_3_C_I123_B0: C20.2(B0) D33.6(V-)
UNNAMED_3_C_I124_B0: C19.2(B0) D33.2(V+)
UNNAMED_3_C_I125_A0: C18.1(A0) D33.5(C2-)
UNNAMED_3_C_I125_B0: C18.2(B0) D33.4(C2+)
UNNAMED_3_C_I126_A0: C17.1(A0) D33.3(C1-)
UNNAMED_3_C_I126_B0: C17.2(B0) D33.1(C1+)
UNNAMED_3_LED_I32_1: D7.1 Q1.3
UNNAMED_3_LED_I32_2: D7.2 R35.2(B0)
UNNAMED_3_LED_I160_2: D23.2 R57.2(B0)
UNNAMED_3_LED_I161_2: D24.2 R59.2(B0)
UNNAMED_3_LED_I162_2: D25.2 R60.2(B0)
UNNAMED_3_LED_I163_2: D26.2 R61.2(B0)
UNNAMED_3_LED_I164_2: D27.2 R62.2(B0)
UNNAMED_3_LED_I165_2: D28.2 R63.2(B0)
UNNAMED_3_LED_I166_2: D29.2 R64.2(B0)
UNNAMED_3_LED_I167_2: D30.2 R65.2(B0)
UNNAMED_3_LED_I176_2: D17.2 R51.2(B0)
UNNAMED_3_LED_I177_2: D18.2 R52.2(B0)
UNNAMED_3_LED_I194_2: D1.2 R12.2(B0)
UNNAMED_3_LED_I195_2: D3.2 R26.2(B0)
UNNAMED_3_LED_I196_2: D5.2 R33.2(B0)
UNNAMED_3_LED_I197_2: D6.2 R34.2(B0)
UNNAMED_3_LED_I198_2: D4.2 R27.2(B0)
UNNAMED_3_LED_I199_2: D2.2 R13.2(B0)
UNNAMED_3_LED_I200_2: D9.2 R39.2(B0)
UNNAMED_3_LED_I201_2: D10.2 R40.2(B0)
UNNAMED_3_LED_I202_2: D11.2 R47.2(B0)
UNNAMED_3_LED_I203_2: D13.2 R49.2(B0)
UNNAMED_3_LED_I204_2: D15.2 R53.2(B0)
UNNAMED_3_LED_I205_2: D16.2 R54.2(B0)
UNNAMED_3_LED_I206_2: D14.2 R50.2(B0)
UNNAMED_3_LED_I207_2: D12.2 R48.2(B0)
UNNAMED_3_LED_I208_2: D19.2 R55.2(B0)
UNNAMED_3_LED_I209_2: D21.2 R66.2(B0)
UNNAMED_3_LED_I210_2: D31.2 R68.2(B0)
UNNAMED_3_LED_I211_2: D32.2 R69.2(B0)
UNNAMED_3_LED_I212_2: D22.2 R67.2(B0)
UNNAMED_3_LED_I213_2: D20.2 R56.2(B0)
UNNAMED_3_R_I99_A0: J39.1 J40.1 J41.1 J42.1 R70.1(A0) U2.8(A)
UNNAMED_3_R_I99_B0: J39.2 J40.2 J41.2 J42.2 R70.2(B0) U2.7(B)
UNNAMED_3_SPXSP3077EEN_I97_R: J32.1 U2.2(R)
UNNAMED_3_SPXSP3232EEY_I127_R1O: D33.12(R1OUT) J36.2
UNNAMED_3_SPXSP3232EEY_I127_R2O: D33.9(R2OUT) J2.2
UNNAMED_3_SPXSP3232EEY_I127_T1I: D33.11(T1IN) J36.1
UNNAMED_3_SPXSP3232EEY_I127_T2I: D33.10(T2IN) J2.1
UNNAMED_3_STD2P541X2DIP_I40_1: J16.1 J16.2 J17.1 J17.2 J18.1 J18.2 J19.1 J19.2 J20.1 J20.2 XS3.1(RF)
UNNAMED_4_C_I2_B0: C14.2(B0) GJ1.6(VDD) L2.2(P2) R233.1(A0)
